# EAGLE board axiom_beta_power_board_v2.23.db4d3e72 (EAGLE 7.7.0), part 1 of 5
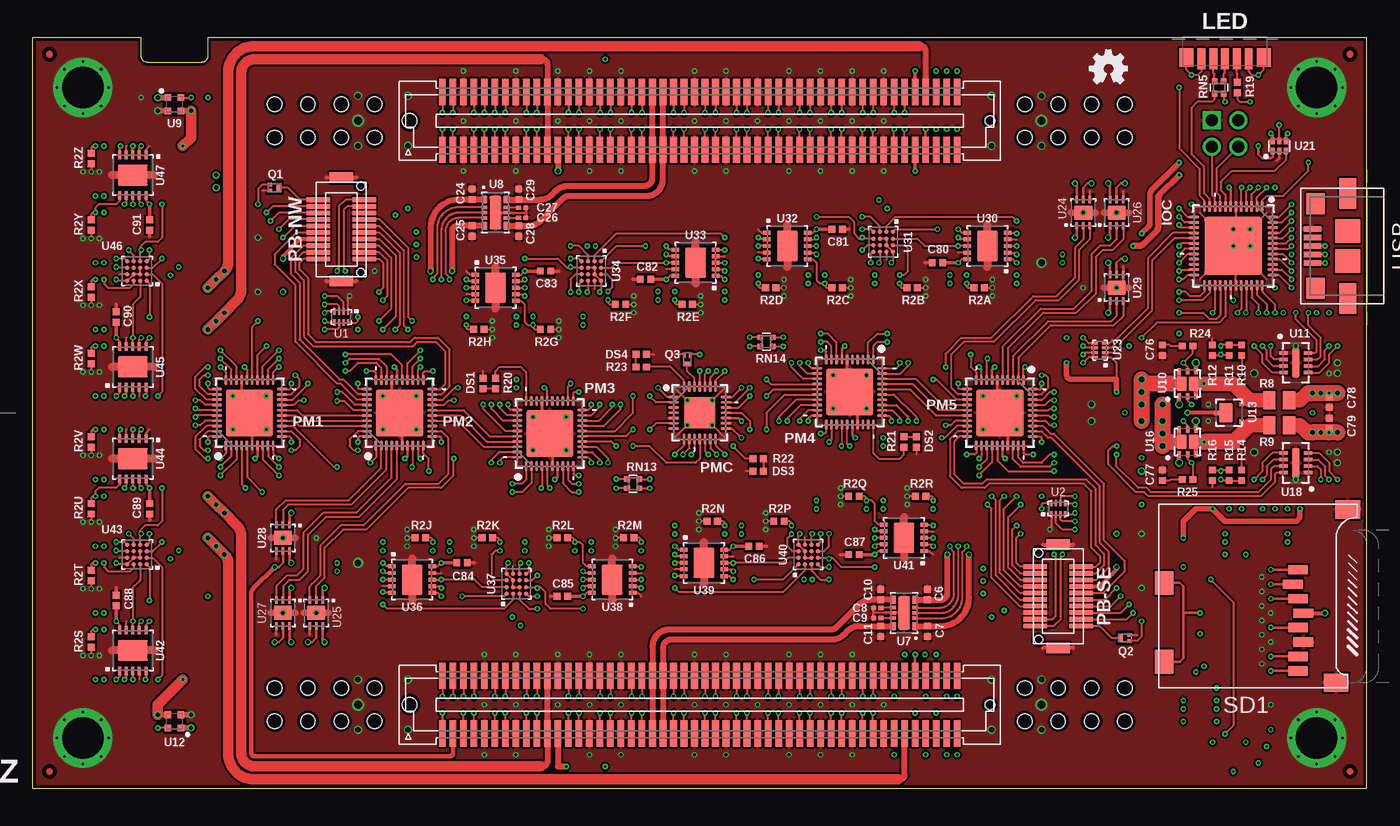
[diagram p0: board, top side]
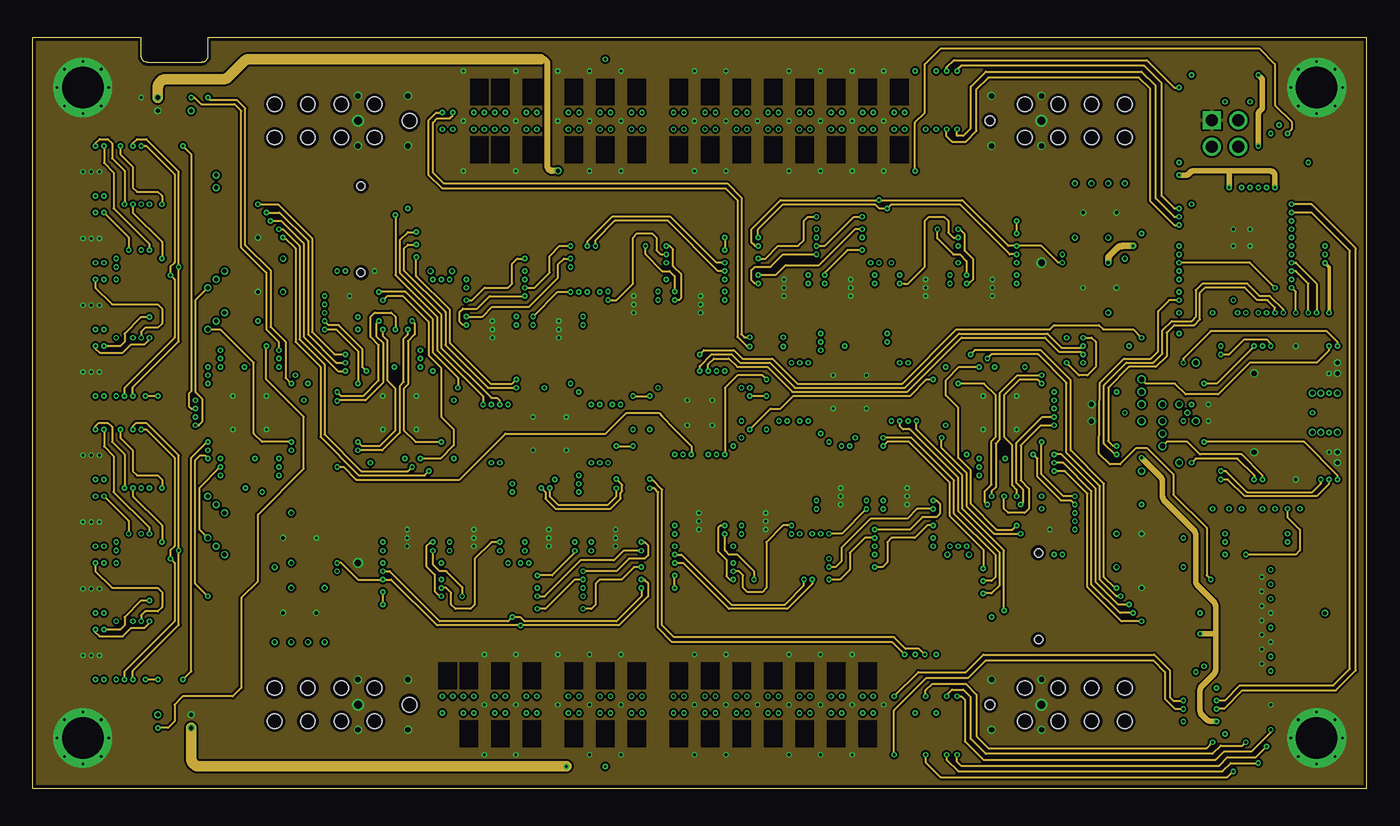
[diagram p1: board, inner layer Route2]
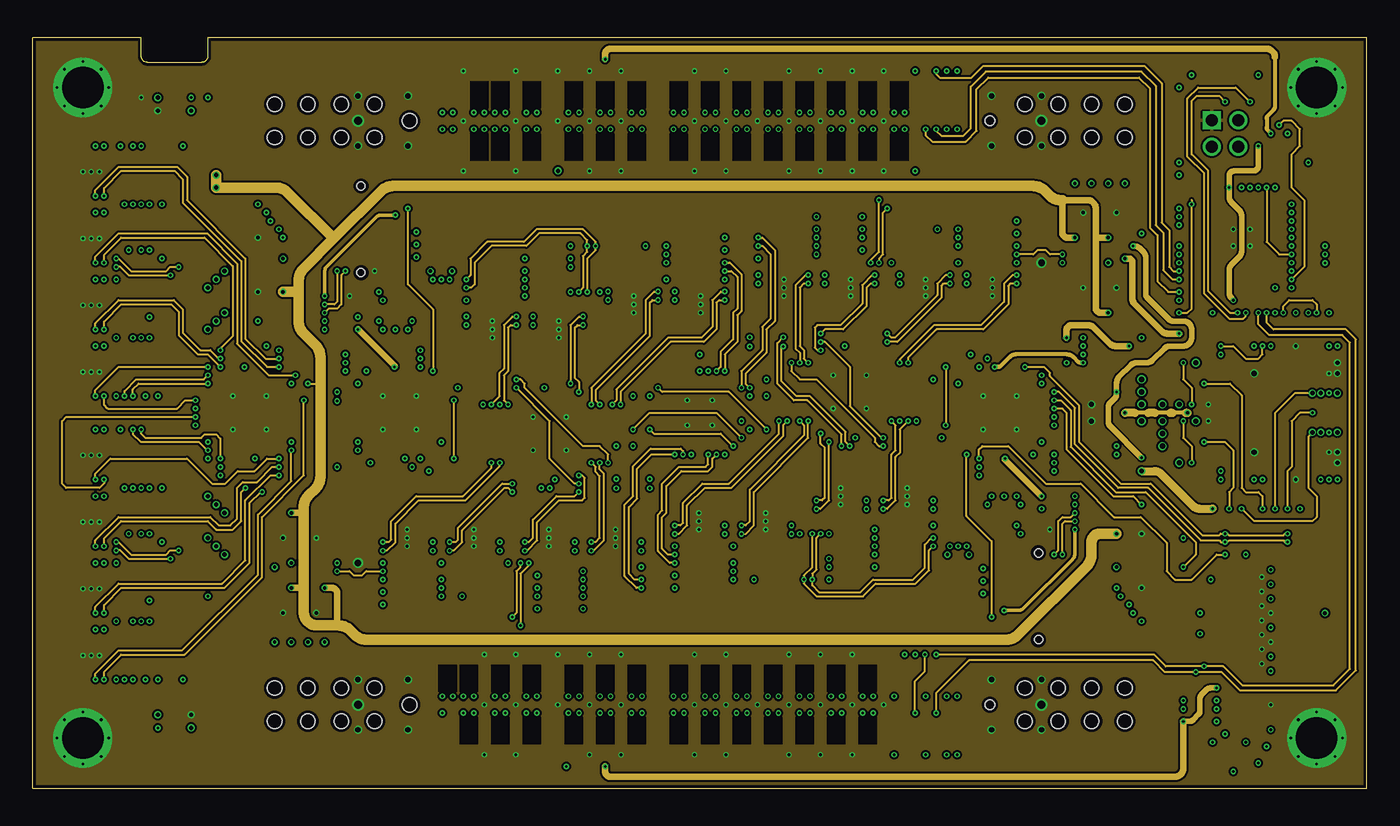
[diagram p2: board, inner layer Route15]
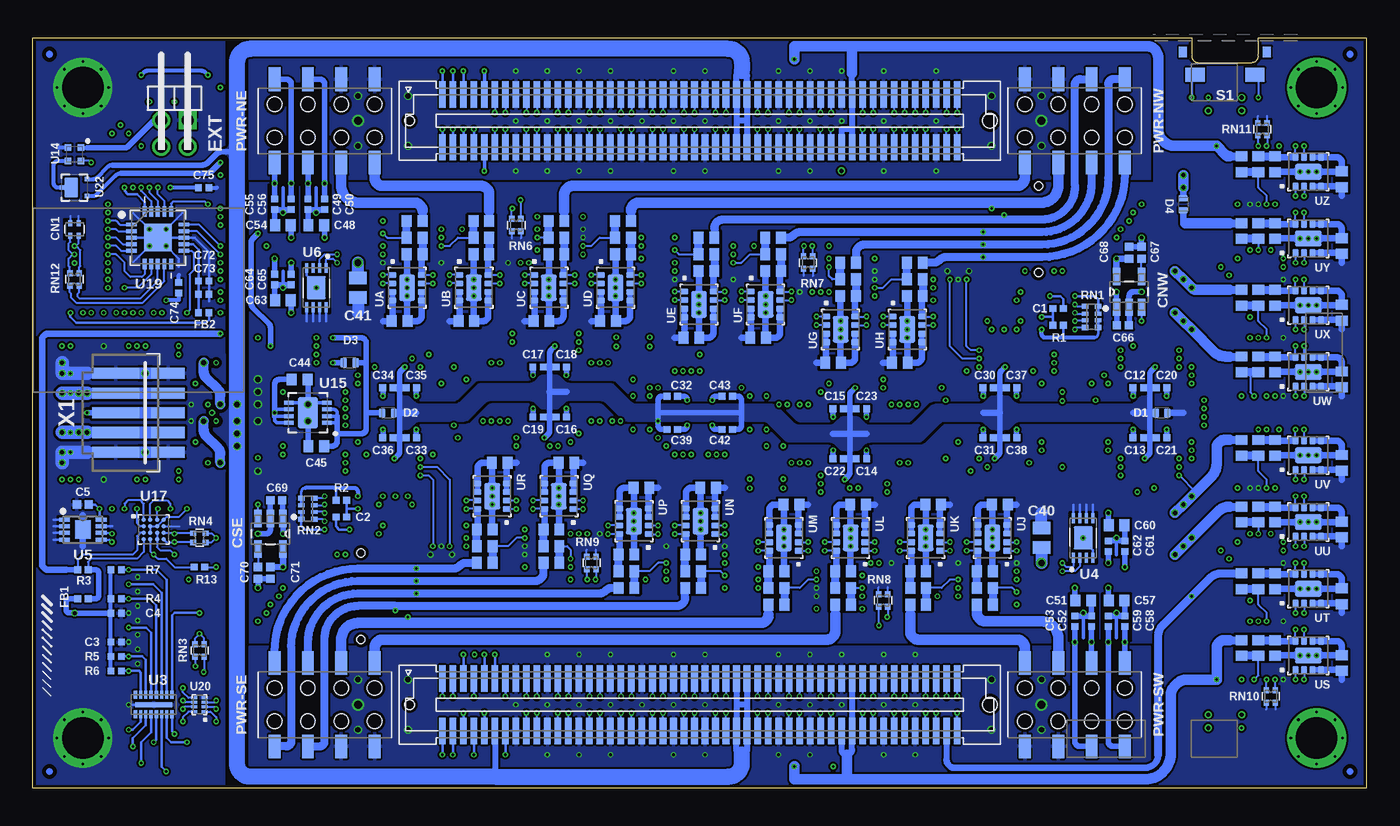
[diagram p3: board, bottom side, seen from below]

Size 101.6 x 57.15 mm. Coordinates in mm from the lower left corner, seen from the top.
Outline: 101.6,57.15 13.33,57.15 13.33,55.75 arc-90 12.83,55.25 8.76,55.25 arc-90 8.25,55.75 8.25,57.15 0,57.15 0,0 101.6,0 101.6,57.15
Copper layers (1*2*15*16): Top 0.035559375mm / dielectric 0.17018125mm / Route2 0.01778125mm / dielectric 47mil / Route15 0.01778125mm / dielectric 0.17018125mm / Bottom 0.035559375mm
Design rules "OSHPark-4layer-tuned *": minimum track width 5mil, minimum drill 8mil, track to track 6mil, track to pad 5mil, pad to pad 5mil, via to via 5mil, smd to smd 0mil, copper to edge 10mil, drill to drill 6mil, minimum pad ring 4mil, minimum via ring 4mil, stop-mask expansion 2mil, vias tented up to drill 25mil, thermal gap 6mil
Net classes: 1 LVDS: width 0.152 mm, drill 0.203 mm, clearance 0.152 mm
tKeepout: area 1.3,50.8 to 6.3,55.9; area 1.3,1.3 to 6.3,6.3; area 95.2,1.3 to 100.3,6.3; area 95.2,50.8 to 100.3,55.9
bKeepout: area 95.2,50.8 to 100.3,55.9; area 95.2,1.3 to 100.3,6.3; area 1.3,1.3 to 6.3,6.3; area 1.3,50.8 to 6.3,55.9

## Footprints (pad centres in the part's own frame; a part is rotated, then mirrored left to right if it is on the bottom)
µZ-SOCKET-NOHOLES-R = smd 0.5 x 2: 1 19.6,24.425; 2 19.6,20.027; 3 18.8,24.425; 4 18.8,20.027; 5 18,24.425; 6 18,20.027; 7 17.2,24.425; 8 17.2,20.027; 9 16.4,24.425; 10 16.4,20.027; 11 15.6,24.425; 12 15.6,20.027; 13 14.8,24.425; 14 14.8,20.027; 15 14,24.425; 16 14,20.027; 17 13.2,24.425; 18 13.2,20.027; 19 12.4,24.425; 20 12.4,20.027; 21 11.6,24.425; 22 11.6,20.027; 23 10.8,24.425; 24 10.8,20.027; 25 10,24.425; 26 10,20.027; 27 9.2,24.425; 28 9.2,20.027; 29 8.4,24.425; 30 8.4,20.027; 31 7.6,24.425; 32 7.6,20.027; 33 6.8,24.425; 34 6.8,20.027; 35 6,24.425; 36 6,20.027; 37 5.2,24.425; 38 5.2,20.027; 39 4.4,24.425; 40 4.4,20.027; 41 3.6,24.425; 42 3.6,20.027; 43 2.8,24.425; 44 2.8,20.027; 45 2,24.425; 46 2,20.027; 47 1.2,24.425; 48 1.2,20.027; 49 0.4,24.425; 50 0.4,20.027; 51 -0.4,24.425; 52 -0.4,20.027; 53 -1.2,24.425; 54 -1.2,20.027; 55 -2,24.425; 56 -2,20.027; 57 -2.8,24.425; 58 -2.8,20.027; 59 -3.6,24.425; 60 -3.6,20.027; 61 -4.4,24.425; 62 -4.4,20.027; 63 -5.2,24.425; 64 -5.2,20.027; 65 -6,24.425; 66 -6,20.027; 67 -6.8,24.425; 68 -6.8,20.027; 69 -7.6,24.425; 70 -7.6,20.027; 71 -8.4,24.425; 72 -8.4,20.027; 73 -9.2,24.425; 74 -9.2,20.027; 75 -10,24.425; 76 -10,20.027; 77 -10.8,24.425; 78 -10.8,20.027; 79 -11.6,24.425; 80 -11.6,20.027; 81 -12.4,24.425; 82 -12.4,20.027; 83 -13.2,24.425; 84 -13.2,20.027; 85 -14,24.425; 86 -14,20.027; 87 -14.8,24.425; 88 -14.8,20.027; 89 -15.6,24.425; 90 -15.6,20.027; 91 -16.4,24.425; 92 -16.4,20.027; 93 -17.2,24.425; 94 -17.2,20.027; 95 -18,24.425; 96 -18,20.027; 97 -18.8,24.425; 98 -18.8,20.027; 99 -19.6,24.425; 100 -19.6,20.027; 101 19.6,-20.025; 102 19.6,-24.425; 103 18.8,-20.027; 104 18.8,-24.425; 105 18,-20.027; 106 18,-24.425; 107 17.2,-20.027; 108 17.2,-24.425; 109 16.4,-20.027; 110 16.4,-24.425; 111 15.6,-20.027; 112 15.6,-24.425; 113 14.8,-20.027; 114 14.8,-24.425; 115 14,-20.027; 116 14,-24.425; 117 13.2,-20.027; 118 13.2,-24.425; 119 12.4,-20.027; 120 12.4,-24.425; 121 11.6,-20.027; 122 11.6,-24.425; 123 10.8,-20.027; 124 10.8,-24.425; 125 10,-20.027; 126 10,-24.425; 127 9.2,-20.027; 128 9.2,-24.425; 129 8.4,-20.027; 130 8.4,-24.425; 131 7.6,-20.027; 132 7.6,-24.425; 133 6.8,-20.027; 134 6.8,-24.425; 135 6,-20.027; 136 6,-24.425; 137 5.2,-20.027; 138 5.2,-24.425; 139 4.4,-20.027; 140 4.4,-24.425; 141 3.6,-20.027; 142 3.6,-24.425; 143 2.8,-20.027; 144 2.8,-24.425; 145 2,-20.027; 146 2,-24.425; 147 1.2,-20.027; 148 1.2,-24.425; 149 0.4,-20.027; 150 0.4,-24.425; 151 -0.4,-20.027; 152 -0.4,-24.425; 153 -1.2,-20.027; 154 -1.2,-24.425; 155 -2,-20.027; 156 -2,-24.425; 157 -2.8,-20.027; 158 -2.8,-24.425; 159 -3.6,-20.027; 160 -3.6,-24.425; 161 -4.4,-20.027; 162 -4.4,-24.425; 163 -5.2,-20.027; 164 -5.2,-24.425; 165 -6,-20.027; 166 -6,-24.425; 167 -6.8,-20.027; 168 -6.8,-24.425; 169 -7.6,-20.027; 170 -7.6,-24.425; 171 -8.4,-20.027; 172 -8.4,-24.425; 173 -9.2,-20.027; 174 -9.2,-24.425; 175 -10,-20.027; 176 -10,-24.425; 177 -10.8,-20.027; 178 -10.8,-24.425; 179 -11.6,-20.027; 180 -11.6,-24.425; 181 -12.4,-20.027; 182 -12.4,-24.425; 183 -13.2,-20.027; 184 -13.2,-24.425; 185 -14,-20.027; 186 -14,-24.425; 187 -14.8,-20.027; 188 -14.8,-24.425; 189 -15.6,-20.027; 190 -15.6,-24.425; 191 -16.4,-20.027; 192 -16.4,-24.425; 193 -17.2,-20.027; 194 -17.2,-24.425; 195 -18,-20.027; 196 -18,-24.425; 197 -18.8,-20.027; 198 -18.8,-24.425; 199 -19.6,-20.027; 200 -19.6,-24.425 | hole 0.725: 22.1,22.225; 22.1,-22.225 | hole 1.125: -22.1,22.225; -22.1,-22.225
0402-C = smd 0.52 x 0.52: 1 -0.4,0; 2 0.4,0
0603-C = smd 0.75 x 0.9: 1 -0.6,0; 2 0.6,0
0402-B = smd 0.62 x 0.62: 1 -0.45,0; 2 0.45,0
0201-C = smd 0.36 x 0.32: 1 -0.28,0; 2 0.28,0
0805-C = smd 0.95 x 1.35: 1 -0.75,0; 2 0.75,0
CC0504 = smd 0.3 x 0.45: 1 -0.32,-0.475; 2 0.32,-0.475; 3 0.32,0.475; 4 -0.32,0.475
SOT95P280X145-5N = smd 1.321 x 0.559: 1 -1.168,0.94; 2 -1.168,0; 3 -1.168,-0.94; 4 1.168,-0.94; 5 1.168,0.94
DFN1006D-2 = smd 0.5 x 0.7: A 0.45,0; C -0.45,0
2X02M/90-S = drill 0.914 square: 1 1,1 | drill 0.914: 2 1,-1; 3 -1,1; 4 -1,-1
UQFN50P600X600X100-49N-NSM = smd 0.8 x 0.2: 1 -3,2.2; 2 -3,1.8; 3 -3,1.4; 4 -3,1; 5 -3,0.6; 6 -3,0.2; 7 -3,-0.2; 8 -3,-0.6; 9 -3,-1; 10 -3,-1.4; 11 -3,-1.8; 12 -3,-2.2; 25 3,-2.2; 26 3,-1.8; 27 3,-1.4; 28 3,-1; 29 3,-0.6; 30 3,-0.2; 31 3,0.2; 32 3,0.6; 33 3,1; 34 3,1.4; 35 3,1.8; 36 3,2.2 | smd 0.2 x 0.8: 13 -2.2,-3; 14 -1.8,-3; 15 -1.4,-3; 16 -1,-3; 17 -0.6,-3; 18 -0.2,-3; 19 0.2,-3; 20 0.6,-3; 21 1,-3; 22 1.4,-3; 23 1.8,-3; 24 2.2,-3; 37 2.2,3; 38 1.8,3; 39 1.4,3; 40 1,3; 41 0.6,3; 42 0.2,3; 43 -0.2,3; 44 -0.6,3; 45 -1,3; 46 -1.4,3; 47 -1.8,3; 48 -2.2,3 | smd 4.4 x 4.4: EP 0,0
MSL0104-SL = smd 1.06 x 1.4: 1 2.95,-0.9; 7 -2.95,-0.9 | smd 0.6 x 1.6: 2 1.8,-1; 3 0.9,-1; 4 0,-1; 5 -0.9,-1; 6 -1.8,-1
DF12(XX)-20DP-0.5V = smd 1.8 x 0.35: 1 -1.75,2.25; 2 1.75,2.25; 3 -1.75,1.75; 4 1.75,1.75; 5 -1.75,1.25; 6 1.75,1.25; 7 -1.75,0.75; 8 1.75,0.75; 9 -1.75,0.25; 10 1.75,0.25; 11 -1.75,-0.25; 12 1.75,-0.25; 13 -1.75,-0.75; 14 1.75,-0.75; 15 -1.75,-1.25; 16 1.75,-1.25; 17 -1.75,-1.75; 18 1.75,-1.75; 19 -1.75,-2.25; 20 1.75,-2.25 | smd 1.8 x 0.8: M1 0,3.95; M2 0,-3.95 | hole 0.625: 1.5,-3.3; 1.5,3.3
UQFN40P500X500X100-41N-NSM = smd 0.75 x 0.2: 1 -2.48,1.8; 2 -2.48,1.4; 3 -2.48,1; 4 -2.48,0.6; 5 -2.48,0.2; 6 -2.48,-0.2; 7 -2.48,-0.6; 8 -2.48,-1; 9 -2.48,-1.4; 10 -2.48,-1.8; 21 2.48,-1.8; 22 2.48,-1.4; 23 2.48,-1; 24 2.48,-0.6; 25 2.48,-0.2; 26 2.48,0.2; 27 2.48,0.6; 28 2.48,1; 29 2.48,1.4; 30 2.48,1.8 | smd 0.2 x 0.75: 11 -1.8,-2.48; 12 -1.4,-2.48; 13 -1,-2.48; 14 -0.6,-2.48; 15 -0.2,-2.48; 16 0.2,-2.48; 17 0.6,-2.48; 18 1,-2.48; 19 1.4,-2.48; 20 1.8,-2.48; 31 1.8,2.48; 32 1.4,2.48; 33 1,2.48; 34 0.6,2.48; 35 0.2,2.48; 36 -0.2,2.48; 37 -0.6,2.48; 38 -1,2.48; 39 -1.4,2.48; 40 -1.8,2.48 | smd 3.6 x 3.6: EP 0,0
UQFN50P400X400X100-29N-NSM = smd 0.8 x 0.2: 1 -2,1.2; 2 -2,0.8; 3 -2,0.4; 4 -2,0; 5 -2,-0.4; 6 -2,-0.8; 7 -2,-1.2; 15 2,-1.2; 16 2,-0.8; 17 2,-0.4; 18 2,0; 19 2,0.4; 20 2,0.8; 21 2,1.2 | smd 0.2 x 0.8: 8 -1.2,-2; 9 -0.8,-2; 10 -0.4,-2; 11 0,-2; 12 0.4,-2; 13 0.8,-2; 14 1.2,-2; 22 1.2,2; 23 0.8,2; 24 0.4,2; 25 0,2; 26 -0.4,2; 27 -0.8,2; 28 -1.2,2 | smd 2.4 x 2.4: EP 0,0
R2X04 = smd 0.9 x 1.8: 1 -3.81,3.175; 2 -3.81,-3.175; 3 -1.27,3.175; 4 -1.27,-3.175; 5 1.27,3.175; 6 1.27,-3.175; 7 3.81,3.175; 8 3.81,-3.175 | hole 1.1: -3.81,1.27; -1.27,1.27; -1.27,-1.27; -3.81,-1.27; 1.27,1.27; 1.27,-1.27; 3.81,1.27; 3.81,-1.27
SOT883(B) = smd 0.4 x 0.25: 1 -0.35,0.225; 2 -0.35,-0.225 | smd 0.4 x 0.7: 3 0.35,0
4X0402ARV341 = smd 0.4 x 0.5: 1 -0.8,-0.5; 4 0.8,-0.5; 5 0.8,0.5; 8 -0.8,0.5 | smd 0.3 x 0.5: 2 -0.25,-0.5; 3 0.25,-0.5; 6 0.25,0.5; 7 -0.25,0.5
EXB24V = smd 0.4 x 0.45: 1 -0.35,-0.475; 2 0.35,-0.475; 3 0.35,0.475; 4 -0.35,0.475
SKSNLAE010 = smd 1.45 x 1.05: 1 -2.275,2.575; 2 2.275,2.575 | smd 0.6 x 0.8: 3 -3.2,0.85; 4 3.2,0.85
TF-MICRO-SD_PP2 = smd 0.7 x 1.5: 1 9,-10.64; 2 7.9,-10.24; 3 6.8,-10.64; 4 5.7,-11.04; 5 4.6,-10.64; 6 3.5,-11.04; 7 2.4,-10.64; 8 1.3,-10.64 | smd 1.8 x 1.4: CD1 2,-0.44; CD2 8,-0.44 | smd 1.4 x 1.9: MT1 0.4,-13.54; MT2 13.6,-14.44
UDFN-8 = smd 0.22 x 0.48: 1 -0.525,-0.43; 2 -0.175,-0.43; 3 0.175,-0.43; 4 0.525,-0.43; 5 0.525,0.43; 6 0.175,0.43; 7 -0.175,0.43; 8 -0.525,0.43
SON40P135X330X55-17N = smd 0.61 x 0.254: 1 -0.737,1.397; 2 -0.737,0.991; 3 -0.737,0.61; 4 -0.737,0.203; 5 -0.737,-0.203; 6 -0.737,-0.61; 7 -0.737,-0.991; 8 -0.737,-1.397; 9 0.737,-1.397; 10 0.737,-0.991; 11 0.737,-0.61; 12 0.737,-0.203; 13 0.737,0.203; 14 0.737,0.61; 15 0.737,0.991; 16 0.737,1.397 | smd 0.406 x 2.794: 17 0,0
DFN-8 = smd 0.3 x 0.75: 1 -0.75,-1.5; 2 -0.25,-1.5; 3 0.25,-1.5; 4 0.75,-1.5; 5 0.75,1.5; 6 0.25,1.5; 7 -0.25,1.5; 8 -0.75,1.5 | smd 1.45 x 1.75: EP 0,0
DFN200X300X100-9N = smd 0.813 x 0.305: 1 -1.397,0.762; 2 -1.397,0.254; 3 -1.397,-0.254; 4 -1.397,-0.762; 5 1.397,-0.762; 6 1.397,-0.254; 7 1.397,0.254; 8 1.397,0.762 | smd 1.194 x 1.397: EP 0,0
V-DFN3020-14 = smd 0.65 x 0.5: 1 -1,-0.85; 5 1,-0.85; 6 1,0.85; 10 -1,0.85 | smd 0.25 x 0.5: 2 -0.4,-0.85; 3 0,-0.85; 4 0.4,-0.85; 7 0.4,0.85; 8 0,0.85; 9 -0.4,0.85 | smd 2.55 x 0.9: EP 0,0
MLF-4 = smd 0.5 x 0.5: 1 -0.5,-0.5; 2 0.5,-0.5; 3 0.5,0.5; 4 -0.5,0.5
UDFN6 = smd 0.47 x 0.35: 1 -0.95,0.65; 2 -0.95,0; 3 -0.95,-0.65; 4 0.95,-0.65; 5 0.95,0; 6 0.95,0.65 | smd 1.1 x 0.75: D1 0,0.46; D2 0,-0.46
DFN8 = smd 0.25 x 0.7: 1 -0.75,-0.925; 2 -0.25,-0.925; 3 0.25,-0.925; 4 0.75,-0.925; 5 0.75,0.925; 6 0.25,0.925; 7 -0.25,0.925; 8 -0.75,0.925 | smd 2.2 x 0.6: EP 0,0
DFN2020D-3 = smd 0.45 x 0.35: 1 -0.95,0.65; 2 -0.95,-0.65; 3 0.95,0 | smd 1 x 1.5: 4 0.25,0
DFN3X3_8LEAD = smd 0.813 x 0.305: 1 -1.448,0.762; 2 -1.448,0.254; 3 -1.448,-0.254; 4 -1.448,-0.762; 5 1.448,-0.762; 6 1.448,-0.254; 7 1.448,0.254; 8 1.448,0.762 | smd 1.549 x 2.388: 9 0,0
WLCSP-16-LP = smd 0.325 x 0.325: A1 -0.75,0.75; A2 -0.25,0.75; A3 0.25,0.75; A4 0.75,0.75; B1 -0.75,0.25; B2 -0.25,0.25; B3 0.25,0.25; B4 0.75,0.25; C1 -0.75,-0.25; C2 -0.25,-0.25; C3 0.25,-0.25; C4 0.75,-0.25; D1 -0.75,-0.75; D2 -0.25,-0.75; D3 0.25,-0.75; D4 0.75,-0.75
QFN65P400X400X100-21N-NSM = smd 0.8 x 0.3: 1 -2,1; 2 -2,0.5; 3 -2,0; 4 -2,-0.5; 5 -2,-1; 11 2,-1; 12 2,-0.5; 13 2,0; 14 2,0.5; 15 2,1 | smd 0.3 x 0.8: 6 -1,-2; 7 -0.5,-2; 8 0,-2; 9 0.5,-2; 10 1,-2; 16 1,2; 17 0.5,2; 18 0,2; 19 -0.5,2; 20 -1,2 | smd 2.1 x 2.1: EP 0,0
X2SON-8 = smd 0.2 x 0.52: 1 -0.525,-0.4; 2 -0.175,-0.4; 3 0.175,-0.4; 4 0.525,-0.4; 5 0.525,0.4; 6 0.175,0.4; 7 -0.175,0.4; 8 -0.525,0.4
MICROPAK-6 = smd 0.3 x 0.5: 1 -0.5,-0.375; 2 0,-0.375; 3 0.5,-0.375; 4 0.5,0.375; 5 0,0.375; 6 -0.5,0.375
DFN2018-6 = smd 0.25 x 0.55: 1 -0.5,-1; 2 0,-1; 3 0.5,-1; 4 0.5,1; 5 0,1; 6 -0.5,1 | smd 1.4 x 1.1: 10 0,0
DFN-10 = smd 0.3 x 0.65: 1 -1,-1.55; 2 -0.5,-1.55; 3 0,-1.55; 4 0.5,-1.55; 5 1,-1.55; 6 1,1.55; 7 0.5,1.55; 8 0,1.55; 9 -0.5,1.55; 10 -1,1.55 | smd 2.3 x 1.6: EP 0,0
MICROSIP = smd 0.48 x 0.58: 1 -0.975,-1.1; 2 -0.325,-1.1; 3 0.325,-1.1; 4 0.975,-1.1; 5 0.975,1.1; 6 0.325,1.1; 7 -0.325,1.1; 8 -0.975,1.1 | smd 2 x 1.2: EP 0,0
MICRO-AB-H-SMT = smd 0.4 x 1.35: 1 -1.3,4.125; 2 -0.65,4.125; 3 0,4.125; 4 0.65,4.125; 5 1.3,4.125 | smd 2.3 x 1.3: Z1 -4,1.45; Z4 4,1.45 | smd 1.8 x 1.9: Z2 -1.15,1.45; Z3 1.15,1.45 | smd 1.6 x 1.4: Z5 -3.2,3.9; Z6 3.2,3.9
PICO-SPOX-5 = smd 0.85 x 2.55: 1 -3,-6.5; 2 -1.5,-6.5; 3 0,-6.5; 4 1.5,-6.5; 5 3,-6.5 | smd 0.85 x 3.55: 1A -3,-2.5; 2A -1.5,-2.5; 3A 0,-2.5; 4A 1.5,-2.5; 5A 3,-2.5
µZ-CONONLY = smd 0.5 x 2: 1 19.6,-24.226; 2 19.6,-20.226; 3 18.8,-24.226; 4 18.8,-20.226; 5 18,-24.226; 6 18,-20.226; 7 17.2,-24.226; 8 17.2,-20.226; 9 16.4,-24.226; 10 16.4,-20.226; 11 15.6,-24.226; 12 15.6,-20.226; 13 14.8,-24.226; 14 14.8,-20.226; 15 14,-24.226; 16 14,-20.226; 17 13.2,-24.226; 18 13.2,-20.226; 19 12.4,-24.226; 20 12.4,-20.226; 21 11.6,-24.226; 22 11.6,-20.226; 23 10.8,-24.226; 24 10.8,-20.226; 25 10,-24.226; 26 10,-20.226; 27 9.2,-24.226; 28 9.2,-20.226; 29 8.4,-24.226; 30 8.4,-20.226; 31 7.6,-24.226; 32 7.6,-20.226; 33 6.8,-24.226; 34 6.8,-20.226; 35 6,-24.226; 36 6,-20.226; 37 5.2,-24.226; 38 5.2,-20.226; 39 4.4,-24.226; 40 4.4,-20.226; 41 3.6,-24.226; 42 3.6,-20.226; 43 2.8,-24.226; 44 2.8,-20.226; 45 2,-24.226; 46 2,-20.226; 47 1.2,-24.226; 48 1.2,-20.226; 49 0.4,-24.226; 50 0.4,-20.226; 51 -0.4,-24.226; 52 -0.4,-20.226; 53 -1.2,-24.226; 54 -1.2,-20.226; 55 -2,-24.226; 56 -2,-20.226; 57 -2.8,-24.226; 58 -2.8,-20.226; 59 -3.6,-24.226; 60 -3.6,-20.226; 61 -4.4,-24.226; 62 -4.4,-20.226; 63 -5.2,-24.226; 64 -5.2,-20.226; 65 -6,-24.226; 66 -6,-20.226; 67 -6.8,-24.226; 68 -6.8,-20.226; 69 -7.6,-24.226; 70 -7.6,-20.226; 71 -8.4,-24.226; 72 -8.4,-20.226; 73 -9.2,-24.226; 74 -9.2,-20.226; 75 -10,-24.226; 76 -10,-20.226; 77 -10.8,-24.226; 78 -10.8,-20.226; 79 -11.6,-24.226; 80 -11.6,-20.226; 81 -12.4,-24.226; 82 -12.4,-20.226; 83 -13.2,-24.226; 84 -13.2,-20.226; 85 -14,-24.226; 86 -14,-20.226; 87 -14.8,-24.226; 88 -14.8,-20.226; 89 -15.6,-24.226; 90 -15.6,-20.226; 91 -16.4,-24.226; 92 -16.4,-20.226; 93 -17.2,-24.226; 94 -17.2,-20.226; 95 -18,-24.226; 96 -18,-20.226; 97 -18.8,-24.226; 98 -18.8,-20.226; 99 -19.6,-24.226; 100 -19.6,-20.226; 101 19.6,20.226; 102 19.6,24.226; 103 18.8,20.226; 104 18.8,24.226; 105 18,20.226; 106 18,24.226; 107 17.2,20.226; 108 17.2,24.226; 109 16.4,20.226; 110 16.4,24.226; 111 15.6,20.226; 112 15.6,24.226; 113 14.8,20.226; 114 14.8,24.226; 115 14,20.226; 116 14,24.226; 117 13.2,20.226; 118 13.2,24.226; 119 12.4,20.226; 120 12.4,24.226; 121 11.6,20.226; 122 11.6,24.226; 123 10.8,20.226; 124 10.8,24.226; 125 10,20.226; 126 10,24.226; 127 9.2,20.226; 128 9.2,24.226; 129 8.4,20.226; 130 8.4,24.226; 131 7.6,20.226; 132 7.6,24.226; 133 6.8,20.226; 134 6.8,24.226; 135 6,20.226; 136 6,24.226; 137 5.2,20.226; 138 5.2,24.226; 139 4.4,20.226; 140 4.4,24.226; 141 3.6,20.226; 142 3.6,24.226; 143 2.8,20.226; 144 2.8,24.226; 145 2,20.226; 146 2,24.226; 147 1.2,20.226; 148 1.2,24.226; 149 0.4,20.226; 150 0.4,24.226; 151 -0.4,20.226; 152 -0.4,24.226; 153 -1.2,20.226; 154 -1.2,24.226; 155 -2,20.226; 156 -2,24.226; 157 -2.8,20.226; 158 -2.8,24.226; 159 -3.6,20.226; 160 -3.6,24.226; 161 -4.4,20.226; 162 -4.4,24.226; 163 -5.2,20.226; 164 -5.2,24.226; 165 -6,20.226; 166 -6,24.226; 167 -6.8,20.226; 168 -6.8,24.226; 169 -7.6,20.226; 170 -7.6,24.226; 171 -8.4,20.226; 172 -8.4,24.226; 173 -9.2,20.226; 174 -9.2,24.226; 175 -10,20.226; 176 -10,24.226; 177 -10.8,20.226; 178 -10.8,24.226; 179 -11.6,20.226; 180 -11.6,24.226; 181 -12.4,20.226; 182 -12.4,24.226; 183 -13.2,20.226; 184 -13.2,24.226; 185 -14,20.226; 186 -14,24.226; 187 -14.8,20.226; 188 -14.8,24.226; 189 -15.6,20.226; 190 -15.6,24.226; 191 -16.4,20.226; 192 -16.4,24.226; 193 -17.2,20.226; 194 -17.2,24.226; 195 -18,20.226; 196 -18,24.226; 197 -18.8,20.226; 198 -18.8,24.226; 199 -19.6,20.226; 200 -19.6,24.226 | hole 1.125: -22.1,-22.225; -22.1,22.225 | hole 0.725: 22.1,-22.225; 22.1,22.225

## Placement (x,y rotation side)
BETA  µZ-FCI-SOCKET-NOHOLES-R  [µZ-SOCKET-NOHOLES-R]  50.8,28.57 0 top
C1  10n  [0402-C]  23.49,36.51 0 bottom
C1A  [0603-C]  73.66,35.56 0 bottom
C1B  [0603-C]  68.58,35.56 0 bottom
C1C  [0603-C]  62.86,35.56 0 bottom
C1D  [0603-C]  57.78,35.56 0 bottom
C1E  [0603-C]  51.43,34.29 0 bottom
C1F  [0603-C]  46.35,34.29 0 bottom
C1G  [0603-C]  40.64,32.38 0 bottom
C1H  [0603-C]  35.56,32.38 0 bottom
C1J  [0603-C]  27.94,21.59 180 bottom
C1K  [0603-C]  33.02,21.59 180 bottom
C1L  [0603-C]  38.73,21.59 180 bottom
C1M  [0603-C]  43.81,21.59 180 bottom
C1N  [0603-C]  50.16,22.86 180 bottom
C1P  [0603-C]  55.24,22.86 180 bottom
C1Q  [0603-C]  60.96,24.77 180 bottom
C1R  [0603-C]  66.04,24.77 180 bottom
C1S  [0603-C]  1.9,9.52 90 bottom
C1T  [0603-C]  1.9,14.6 90 bottom
C1U  [0603-C]  1.9,19.68 90 bottom
C1V  [0603-C]  1.9,24.77 90 bottom
C1W  [0603-C]  1.9,31.11 90 bottom
C1X  [0603-C]  1.9,36.2 90 bottom
C1Y  [0603-C]  1.9,41.27 90 bottom
C1Z  [0603-C]  1.9,46.36 90 bottom
C2  10n  [0402-C]  78.1,20.64 180 bottom
C2A  [0603-C]  72.52,40.64 180 bottom
C2B  [0603-C]  67.44,40.64 180 bottom
C2C  [0603-C]  61.72,40.64 180 bottom
C2D  [0603-C]  56.64,40.64 180 bottom
C2E  [0603-C]  50.29,39.37 180 bottom
C2F  [0603-C]  45.21,39.37 180 bottom
C2G  [0603-C]  39.5,37.47 180 bottom
C2H  [0603-C]  34.42,37.47 180 bottom
C2J  [0603-C]  29.08,16.51 0 bottom
C2K  [0603-C]  34.16,16.51 0 bottom
C2L  [0603-C]  39.88,16.51 0 bottom
C2M  [0603-C]  44.96,16.51 0 bottom
C2N  [0603-C]  51.31,17.78 0 bottom
C2P  [0603-C]  56.39,17.78 0 bottom
C2Q  [0603-C]  62.1,19.68 0 bottom
C2R  [0603-C]  67.18,19.68 0 bottom
C2S  [0603-C]  6.98,10.67 270 bottom
C2T  [0603-C]  6.98,15.75 270 bottom
C2U  [0603-C]  6.98,20.83 270 bottom
C2V  [0603-C]  6.98,25.91 270 bottom
C2W  [0603-C]  6.98,32.26 270 bottom
C2X  [0603-C]  6.98,37.34 270 bottom
C2Y  [0603-C]  6.98,42.42 270 bottom
C2Z  [0603-C]  6.98,47.5 270 bottom
C3  1u  [0402-C]  95.25,11.12 0 bottom
C4  100n  [0402-C]  95.25,13.32 0 bottom
C5  100n  [0402-B]  97.79,21.59 180 bottom
C6  [0402-C]  68.14,14.73 90 top
C7  [0402-C]  68.14,11.94 270 top
C8  [0201-C]  64.33,13.72 180 top
C9  [0201-C]  64.33,12.95 180 top
C10  [0402-C]  64.58,14.73 90 top
C11  [0402-C]  64.58,11.94 270 top
C12  100n  [0402-C]  17.4,30.48 180 bottom
C13  100n  [0402-C]  17.4,26.67 180 bottom
C14  100n  [0402-C]  38.48,25.08 0 bottom
C15  100n  [0402-C]  40.26,28.89 180 bottom
C16  100n  [0402-C]  61.34,28.26 0 bottom
C17  100n  [0402-C]  63.12,32.07 180 bottom
C18  4u7  [0402-C]  61.34,32.07 0 bottom
C19  4u7  [0402-C]  63.12,28.26 180 bottom
C20  4u7  [0402-C]  15.62,30.48 0 bottom
C21  4u7  [0402-C]  15.62,26.67 0 bottom
C22  4u7  [0402-C]  40.26,25.08 180 bottom
C23  4u7  [0402-C]  38.48,28.89 0 bottom
C24  [0402-C]  33.46,45.21 90 top
C25  [0402-C]  33.46,42.42 270 top
C26  [0201-C]  37.27,43.43 0 top
C27  [0201-C]  37.27,44.2 0 top
C28  [0402-C]  37.02,42.42 270 top
C29  [0402-C]  37.02,45.21 90 top
C30  100n  [0402-C]  28.83,30.48 180 bottom
C31  100n  [0402-C]  28.83,26.67 180 bottom
C32  100n  [0402-C]  52.9,29.84 0 bottom
C33  100n  [0402-C]  72.77,26.67 0 bottom
C34  100n  [0402-C]  74.55,30.48 180 bottom
C35  4u7  [0402-C]  72.77,30.48 0 bottom
C36  4u7  [0402-C]  74.55,26.67 180 bottom
C37  4u7  [0402-C]  27.05,30.48 0 bottom
C38  4u7  [0402-C]  27.05,26.67 0 bottom
C39  4u7  [0402-C]  52.9,27.3 0 bottom
C40  47u  [0805-C]  24.76,19.05 270 bottom
C41  47u  [0805-C]  76.83,38.1 90 bottom
C42  10u  [0402-C]  48.7,27.3 180 bottom
C43  10u  [0402-C]  48.7,29.84 180 bottom
C44  10u  [0603-C]  81.28,31.11 0 bottom
C45  10u  [0603-C]  80.01,26.04 180 bottom
C48  4u7  [0603-C]  80.01,42.86 180 bottom
C49  1u  [0402-C]  80.64,44.45 270 bottom
C50  1u  [0402-C]  79.38,44.45 270 bottom
C51  4u7  [0603-C]  21.59,14.29 0 bottom
C52  1u  [0402-C]  20.95,12.7 90 bottom
C53  1u  [0402-C]  22.22,12.7 90 bottom
C54  4u7  [0603-C]  82.55,42.86 180 bottom
C55  1u  [0402-C]  83.19,44.45 270 bottom
C56  1u  [0402-C]  81.91,44.45 270 bottom
C57  4u7  [0603-C]  19.05,14.29 0 bottom
C58  1u  [0402-C]  18.41,12.7 90 bottom
C59  1u  [0402-C]  19.68,12.7 90 bottom
C60  4u7  [0603-C]  19.05,20 0 bottom
C61  1u  [0402-C]  18.41,18.41 90 bottom
C62  1u  [0402-C]  19.68,18.41 90 bottom
C63  4u7  [0603-C]  82.55,37.15 180 bottom
C64  1u  [0402-C]  83.19,38.73 270 bottom
C65  1u  [0402-C]  81.91,38.73 270 bottom
C66  1u  [0402-B]  18.57,35.24 0 bottom
C67  10n  [0402-B]  17.14,40.77 90 bottom
C68  1u  [0402-B]  18.1,40.77 90 bottom
C69  1u  [0402-B]  83.06,21.91 180 bottom
C70  10n  [0402-B]  84.45,16.38 270 bottom
C71  1u  [0402-B]  83.5,16.38 270 bottom
C72  4u7  [0402-C]  88.58,38.61 0 bottom
C73  100n  [0402-C]  88.58,37.59 0 bottom
C74  4u7  [0402-C]  90.49,38.1 90 bottom
C75  100n  [0402-C]  88.58,45.72 0 bottom
C76  10n  [0402-C]  86.04,33.34 270 top
C77  10n  [0402-C]  86.04,23.81 90 top
C78  10n  [0402-C]  98.74,29.4 270 top
C79  10n  [0402-C]  98.74,27.75 90 top
C80  [0402-C]  68.9,40 180 top
C81  [0402-C]  61.28,42.55 0 top
C82  [0402-C]  46.67,38.73 180 top
C83  [0402-C]  39.05,39.37 0 top
C84  [0402-C]  32.7,17.14 0 top
C85  [0402-C]  40.32,14.6 180 top
C86  [0402-C]  54.93,18.41 0 top
C87  [0402-C]  62.55,17.78 180 top
C88  [0402-C]  6.35,14.29 90 top
C89  [0402-C]  8.89,21.27 270 top
C90  [0402-C]  6.35,35.88 90 top
C91  [0402-C]  8.89,42.86 270 top
CN1  [CC0504]  98.42,42.55 180 bottom
CNW  SPX3819M5-L  [SOT95P280X145-5N]  18.1,37.78 90 bottom
CSE  SPX3819M5-L  [SOT95P280X145-5N]  83.5,19.37 270 bottom
D1  PMEG2010BELD  [DFN1006D-2]  15.62,28.57 0 bottom
D2  PMEG2010BELD  [DFN1006D-2]  74.55,28.57 180 bottom
D3  PMEG2010BELD  [DFN1006D-2]  77.47,32.38 0 bottom
D4  PMEG2010BELD  [DFN1006D-2]  13.97,44.45 270 bottom
DS1  [0402-C]  34.29,30.8 90 top
DS2  [0402-C]  67.31,26.35 270 top
DS3  [0402-C]  55.24,24.13 180 top
DS4  [0402-C]  46.35,33.02 0 top
EXT  [2X02M/90-S]  90.81,49.85 0 bottom
F1  FIDUCIAL  [FID_ARROW]  1.27,55.88 0 top
F2  FIDUCIAL  [FID_ARROW]  100.33,55.88 0 bottom
F3  FIDUCIAL  [FID_ARROW]  100.33,55.88 0 top
F4  FIDUCIAL  [FID_ARROW]  1.27,55.88 0 bottom
F5  FIDUCIAL  [FID_ARROW]  100.33,1.27 0 top
F6  FIDUCIAL  [FID_ARROW]  1.27,1.27 0 bottom
F7  FIDUCIAL  [FID_ARROW]  1.27,1.27 0 top
F8  FIDUCIAL  [FID_ARROW]  100.33,1.27 0 bottom
FB1  [0402-C]  97.79,14.42 180 bottom
FB2  [0402-C]  88.58,36.2 0 bottom
FBA  [0603-C]  72.52,43.18 0 bottom
FBB  [0603-C]  67.44,43.18 0 bottom
FBC  [0603-C]  61.72,43.18 0 bottom
FBD  [0603-C]  56.64,43.18 0 bottom
FBE  [0603-C]  50.29,41.91 0 bottom
FBF  [0603-C]  45.21,41.91 0 bottom
FBG  [0603-C]  39.5,40 0 bottom
FBH  [0603-C]  34.42,40 0 bottom
FBJ  [0603-C]  29.08,13.97 180 bottom
FBK  [0603-C]  34.16,13.97 180 bottom
FBL  [0603-C]  39.88,13.97 180 bottom
FBM  [0603-C]  44.96,13.97 180 bottom
FBN  [0603-C]  51.31,15.24 180 bottom
FBP  [0603-C]  56.39,15.24 180 bottom
FBQ  [0603-C]  62.1,17.14 180 bottom
FBR  [0603-C]  67.18,17.14 180 bottom
FBS  [0603-C]  9.52,10.67 90 bottom
FBT  [0603-C]  9.52,15.75 90 bottom
FBU  [0603-C]  9.52,20.83 90 bottom
FBV  [0603-C]  9.52,25.91 90 bottom
FBW  [0603-C]  9.52,32.26 90 bottom
FBX  [0603-C]  9.52,37.34 90 bottom
FBY  [0603-C]  9.52,42.42 90 bottom
FBZ  [0603-C]  9.52,47.5 90 bottom
IOC  PIC16F15386  [UQFN50P600X600X100-49N-NSM]  91.44,41.27 270 top
LED  MSL0104RGB  [MSL0104-SL]  90.81,56.52 0 top
LOGO1  OSHW_LOGO_FILLX0100-NT  [OSHW_FILLX100_NOTEXT]  80.52,53.66 0 top
PB-NW  DF12(XX)-20DP-0.5V  [DF12(XX)-20DP-0.5V]  23.49,42.55 0 top
PB-SE  DF12(XX)-20DP-0.5V  [DF12(XX)-20DP-0.5V]  78.1,14.6 180 top
PM1  PIC16F1779-NSM  [UQFN40P500X500X100-41N-NSM]  16.51,28.57 90 top
PM2  PIC16F1779-NSM  [UQFN40P500X500X100-41N-NSM]  27.94,28.57 90 top
PM3  PIC16F1779-NSM  [UQFN40P500X500X100-41N-NSM]  39.37,26.99 90 top
PM4  PIC16F1779-NSM  [UQFN40P500X500X100-41N-NSM]  62.23,30.16 270 top
PM5  PIC16F1779-NSM  [UQFN40P500X500X100-41N-NSM]  73.66,28.57 270 top
PMC  PIC16F15356  [UQFN50P400X400X100-29N-NSM]  50.8,28.57 0 top
PWR-NE  PINRC-2X04  [R2X04]  79.38,50.8 180 bottom
PWR-NW  PINRC-2X04  [R2X04]  22.22,50.8 0 bottom
PWR-SE  PINRC-2X04  [R2X04]  79.38,6.35 180 bottom
PWR-SW  PINRC-2X04  [R2X04]  22.22,6.35 0 bottom
Q1  NX3008NBKMB  [SOT883(B)]  18.41,45.72 0 top
Q2  NX3008NBKMB  [SOT883(B)]  83.19,11.43 180 top
Q3  NX3008NBKMB  [SOT883(B)]  49.85,32.64 270 top
R1  200k  [0402-C]  23.49,35.24 180 bottom
R1A  [0603-C]  72.52,41.91 180 bottom
R1B  [0603-C]  67.44,41.91 180 bottom
R1C  [0603-C]  61.72,41.91 180 bottom
R1D  [0603-C]  56.64,41.91 180 bottom
R1E  [0603-C]  50.29,40.64 180 bottom
R1F  [0603-C]  45.21,40.64 180 bottom
R1G  [0603-C]  39.5,38.73 180 bottom
R1H  [0603-C]  34.42,38.73 180 bottom
R1J  [0603-C]  29.08,15.24 0 bottom
R1K  [0603-C]  34.16,15.24 0 bottom
R1L  [0603-C]  39.88,15.24 0 bottom
R1M  [0603-C]  44.96,15.24 0 bottom
R1N  [0603-C]  51.31,16.51 0 bottom
R1P  [0603-C]  56.39,16.51 0 bottom
R1Q  [0603-C]  62.1,18.41 0 bottom
R1R  [0603-C]  67.18,18.41 0 bottom
R1S  [0603-C]  8.25,10.67 270 bottom
R1T  [0603-C]  8.25,15.75 270 bottom
R1U  [0603-C]  8.25,20.83 270 bottom
R1V  [0603-C]  8.25,25.91 270 bottom
R1W  [0603-C]  8.25,32.26 270 bottom
R1X  [0603-C]  8.25,37.34 270 bottom
R1Y  [0603-C]  8.25,42.42 270 bottom
R1Z  [0603-C]  8.25,47.5 270 bottom
R2  200k  [0402-C]  78.1,21.91 0 bottom
R2A  [0402-C]  72.07,38.1 180 top
R2B  [0402-C]  66.99,38.1 180 top
R2C  [0402-C]  61.28,38.1 180 top
R2D  [0402-C]  56.2,38.1 180 top
R2E  [0402-C]  49.85,36.83 180 top
R2F  [0402-C]  44.77,36.83 180 top
R2G  [0402-C]  39.05,34.92 180 top
R2H  [0402-C]  33.97,34.92 180 top
R2J  [0402-C]  29.53,19.05 0 top
R2K  [0402-C]  34.61,19.05 0 top
R2L  [0402-C]  40.32,19.05 0 top
R2M  [0402-C]  45.4,19.05 0 top
R2N  [0402-C]  51.75,20.32 0 top
R2P  [0402-C]  56.83,20.32 0 top
R2Q  [0402-C]  62.55,22.23 0 top
R2R  [0402-C]  67.63,22.23 0 top
R2S  [0402-C]  4.45,11.11 90 top
R2T  [0402-C]  4.45,16.19 90 top
R2U  [0402-C]  4.45,21.27 90 top
R2V  [0402-C]  4.45,26.35 90 top
R2W  [0402-C]  4.45,32.7 90 top
R2X  [0402-C]  4.45,37.78 90 top
R2Y  [0402-C]  4.45,42.86 90 top
R2Z  [0402-C]  4.45,47.94 90 top
R3  [0402-C]  97.79,16.62 0 bottom
R4  50k  [0402-C]  95.25,14.42 0 bottom
R5  50k  [0402-C]  95.25,10.02 0 bottom
R6  50k  [0402-C]  95.25,8.92 0 bottom
R7  50k  [0402-C]  95.25,16.62 0 bottom
R8  [0805-C]  94.93,29.53 180 top
R9  [0805-C]  94.93,27.62 180 top
R10  243k  [0402-C]  92.07,33.34 90 top
R11  5k11  [0402-C]  91.12,33.34 270 top
R12  24k9  [0402-C]  89.85,33.34 90 top
R13  [0402-C]  88.9,16.83 180 bottom
R14  243k  [0402-C]  92.07,23.81 270 top
R15  5k11  [0402-C]  91.12,23.81 90 top
R16  24k9  [0402-C]  89.85,23.81 270 top
R19  [0402-C]  91.76,53.34 270 top
R20  [0402-C]  35.24,30.8 270 top
R21  [0402-C]  66.36,26.35 90 top
R22  [0402-C]  55.24,25.08 0 top
R23  [0402-C]  46.35,32.07 180 top
R24  5k11  [0402-C]  87.95,33.66 180 top
R25  5k11  [0402-C]  87.95,23.49 180 top
RN1  [4X0402ARV341]  20.95,35.88 270 bottom
RN2  [4X0402ARV341]  80.64,21.27 90 bottom
RN3  [EXB24V]  88.9,10.48 0 bottom
RN4  [EXB24V]  88.9,19.05 270 bottom
RN5  [EXB24V]  90.35,53.34 180 top
RN6  [EXB24V]  64.77,42.86 180 bottom
RN7  [EXB24V]  42.54,40 180 bottom
RN8  [EXB24V]  36.83,14.29 0 bottom
RN9  [EXB24V]  59.05,17.14 0 bottom
RN10  [EXB24V]  7.3,6.98 180 bottom
RN11  [EXB24V]  7.94,50.16 0 bottom
RN12  [EXB24V]  98.42,38.73 180 bottom
RN13  [EXB24V]  45.72,23.18 90 top
RN14  [EXB24V]  55.88,33.97 270 top
S1  SKSNLAE010  [SKSNLAE010]  10.79,56.9 180 bottom
SD1  MICRO-SD-2CD  [TF-MICRO-SD_PP2]  85.72,7.62 90 top
U1  PCA9306  [UDFN-8]  23.49,35.88 180 top
U2  PCA9306  [UDFN-8]  78.1,21.27 0 top
U3  IP4251CZ16-8-TTL  [SON40P135X330X55-17N]  92.39,6.35 270 bottom
U4  MCP9808  [DFN-8]  21.59,19.05 0 bottom
U5  BR24G04NUX  [DFN200X300X100-9N]  97.79,19.68 0 bottom
U6  MCP9808  [DFN-8]  80.01,38.1 180 bottom
U7  AP22966  [V-DFN3020-14]  66.36,13.33 90 top
U8  AP22966  [V-DFN3020-14]  35.24,43.81 270 top
U9  MIC94040  [MLF-4]  10.79,52.07 270 top
U10  NTLUD4C26N  [UDFN6]  87.95,30.8 90 top
U11  LTC4365  [DFN8]  96.2,32.38 270 top
U12  MIC94040  [MLF-4]  10.79,5.08 90 top
U13  PMEG2020CPAS  [DFN2020D-3]  91.12,28.57 180 top
U14  MIC94040  [MLF-4]  98.42,48.26 180 bottom
U15  LT1965  [DFN3X3_8LEAD]  80.64,28.57 180 bottom
U16  NTLUD4C26N  [UDFN6]  87.95,26.35 90 top
U17  PAC1934-LP  [WLCSP-16-LP]  92.39,19.68 0 bottom
U18  LTC4365  [DFN8]  96.2,24.77 90 top
U19  FT231-NSM  [QFN65P400X400X100-21N-NSM]  92.07,41.91 0 bottom
U20  TXS0102  [X2SON-8]  88.9,6.35 90 bottom
U21  FXLH1T45  [MICROPAK-6]  94.93,48.89 0 top
U22  PMEG2020CPAS  [DFN2020D-3]  98.42,45.72 180 bottom
U23  TXS0102  [X2SON-8]  81.28,33.34 90 top
U24  AP7312-3333FM-7  [DFN2018-6]  80.01,43.81 0 top
U25  AP7312-3333FM-7  [DFN2018-6]  21.59,13.33 180 top
U26  AP7312-3333FM-7  [DFN2018-6]  82.55,43.81 0 top
U27  AP7312-3333FM-7  [DFN2018-6]  19.05,13.33 180 top
U28  AP7312-3333FM-7  [DFN2018-6]  19.05,19.05 180 top
U29  AP7312-3333FM-7  [DFN2018-6]  82.55,38.1 0 top
U30  MCP46X2  [DFN-10]  72.71,41.27 90 top
U31  PAC1934-LP  [WLCSP-16-LP]  64.77,41.59 270 top
U32  MCP46X2  [DFN-10]  57.47,41.27 270 top
U33  MCP46X2  [DFN-10]  50.48,40 90 top
U34  PAC1934-LP  [WLCSP-16-LP]  42.54,39.37 270 top
U35  MCP46X2  [DFN-10]  35.24,38.1 270 top
U36  MCP46X2  [DFN-10]  28.89,15.88 270 top
U37  PAC1934-LP  [WLCSP-16-LP]  36.83,15.56 90 top
U38  MCP46X2  [DFN-10]  44.13,15.88 90 top
U39  MCP46X2  [DFN-10]  51.12,17.14 270 top
U40  PAC1934-LP  [WLCSP-16-LP]  59.05,17.78 90 top
U41  MCP46X2  [DFN-10]  66.36,19.05 90 top
U42  MCP46X2  [DFN-10]  7.62,10.48 0 top
U43  PAC1934-LP  [WLCSP-16-LP]  7.94,17.78 180 top
U44  MCP46X2  [DFN-10]  7.62,25.08 180 top
U45  MCP46X2  [DFN-10]  7.62,32.07 0 top
U46  PAC1934-LP  [WLCSP-16-LP]  7.94,39.37 180 top
U47  MCP46X2  [DFN-10]  7.62,46.67 180 top
UA  TPS82085  [MICROSIP]  73.09,38.1 270 bottom
UB  TPS82085  [MICROSIP]  68.01,38.1 270 bottom
UC  TPS82085  [MICROSIP]  62.29,38.1 270 bottom
UD  TPS82085  [MICROSIP]  57.21,38.1 270 bottom
UE  TPS82085  [MICROSIP]  50.86,36.83 270 bottom
UF  TPS82085  [MICROSIP]  45.78,36.83 270 bottom
UG  TPS82085  [MICROSIP]  40.07,34.92 270 bottom
UH  TPS82085  [MICROSIP]  34.99,34.92 270 bottom
UJ  TPS82085  [MICROSIP]  28.51,19.05 90 bottom
UK  TPS82085  [MICROSIP]  33.59,19.05 90 bottom
UL  TPS82085  [MICROSIP]  39.31,19.05 90 bottom
UM  TPS82085  [MICROSIP]  44.39,19.05 90 bottom
UN  TPS82085  [MICROSIP]  50.74,20.32 90 bottom
UP  TPS82085  [MICROSIP]  55.82,20.32 90 bottom
UQ  TPS82085  [MICROSIP]  61.53,22.23 90 bottom
UR  TPS82085  [MICROSIP]  66.61,22.23 90 bottom
US  TPS82085  [MICROSIP]  4.45,10.1 0 bottom
USB  5_USB_3S  [MICRO-AB-H-SMT]  101.6,41.27 90 top
UT  TPS82085  [MICROSIP]  4.45,15.18 0 bottom
UU  TPS82085  [MICROSIP]  4.45,20.26 0 bottom
UV  TPS82085  [MICROSIP]  4.45,25.34 0 bottom
UW  TPS82085  [MICROSIP]  4.45,31.69 0 bottom
UX  TPS82085  [MICROSIP]  4.45,36.77 0 bottom
UY  TPS82085  [MICROSIP]  4.45,41.85 0 bottom
UZ  TPS82085  [MICROSIP]  4.45,46.93 0 bottom
X1  PICO-SPOX-5  [PICO-SPOX-5]  97.79,28.57 90 bottom
ZED  µZ-FCI-CONONLY  [µZ-CONONLY]  50.8,28.57 180 bottom

## Library data of the parts
BETA ZED = microzed
C1 C1A C1B C1C C1D C1E C1F C1G C1H C1J C1K C1L C1M C1N C1P C1Q C1R C1S C1T C1U C1V C1W C1X C1Y C1Z C2 C2A C2B C2C C2D C2E C2F C2G C2H C2J C2K C2L C2M C2N C2P C2Q C2R C2S C2T C2U C2V C2W C2X C2Y C2Z C3-C45 C48-C91 DS1-DS4 FB1 FB2 FBA FBB FBC FBD FBE FBF FBG FBH FBJ FBK FBL FBM FBN FBP FBQ FBR FBS FBT FBU FBV FBW FBX FBY FBZ R1 R1A R1B R1C R1D R1E R1F R1G R1H R1J R1K R1L R1M R1N R1P R1Q R1R R1S R1T R1U R1V R1W R1X R1Y R1Z R2 R2A R2B R2C R2D R2E R2F R2G R2H R2J R2K R2L R2M R2N R2P R2Q R2R R2S R2T R2U R2V R2W R2X R2Y R2Z R3-R16 R19-R25 = generic-rcl
CN1 = array
CNW CSE = spx3819; MPN: SPX3819M5-L; OC_FARNELL: 1831948; OC_NEWARK: 23R9689; PACKAGE: SOT-23-5; SUPPLIER: EXAR
D1-D4 = pmeg2010beld
EXT = pinhead-2
F1-F8 = fiducial
IOC PMC = pic16f15386
LED = led
LOGO1 = ohw-logo
PB-NW PB-SE = df12
PM1-PM5 = pic16f1779
PWR-NE PWR-NW PWR-SE PWR-SW = pincon
Q1-Q3 = transistor
RN1 RN2 = resistor-dil; OC_FARNELL: unknown; OC_NEWARK: unknown
RN3-RN14 = array; OC_FARNELL: unknown; OC_NEWARK: unknown
S1 = switch
SD1 = micro-sd
U1 U2 = gtl2002
U3 = emifil; MPN: IP4251CZ16-8-TTL; OC_FARNELL: 1972684; OC_NEWARK: 58T9585; PACKAGE: SON-16; SUPPLIER: NXP
U4 U6 = lm75
U5 = eeprom
U7 U8 = AP22966
U9 U12 U14 = load_switch
U10 U16 = ntlud4c26n
U11 U18 = ltc4365
U13 U22 = pmeg2020cpas
U15 = lt1965
U17 U31 U34 U37 U40 U43 U46 = pac1934
U19 = ft23x
U20 U21 U23 = lvltrans
U24-U29 = ldo
U30 U32 U33 U35 U36 U38 U39 U41 U42 U44 U45 U47 = digipot
UA UB UC UD UE UF UG UH UJ UK UL UM UN UP UQ UR US UT UU UV UW UX UY UZ = TPS82085
USB = usb; TE: 1981584
X1 = pico-spox

## Nets
!ALERT: PM5.22 U17.C3 U17.D3
!MCLR_1: PM1.16 PM2.36
!MCLR_2: PM2.16 PM3.36
!MCLR_3: PM3.16 PMC.2
!MCLR_4: PM4.16 PMC.1
!MCLR_5: PM4.36 PM5.16
!MCLR_C: PMC.26 Q3.3
!RESET: IOC.27 U19.11
A_!RST: PB-NW.1 Q1.3
A_RST [LVDS]: PM2.25 Q1.1
A_SCL: PB-NW.2 RN1.1 U1.3
A_SDA: PB-NW.4 RN1.2 U1.4
ANY_IN: C44.1 U13.3 U13.4 U15.6 U15.7 U15.8
B_!RST: PB-SE.1 Q2.3
B_RST [LVDS]: PM5.25 Q2.1
B_SCL: PB-SE.2 RN2.1 U2.3
B_SDA: PB-SE.4 RN2.2 U2.4
BACK_1: PM1.13 PMC.10
BACK_5: PM5.13 PMC.18
BANK13_00_N [LVDS]: BETA.89 ZED.89
BANK13_00_P [LVDS]: BETA.87 ZED.87
BANK13_01_N [LVDS]: BETA.90 ZED.90
BANK13_01_P [LVDS]: BETA.88 ZED.88
BANK13_02_N [LVDS]: BETA.93 ZED.93
BANK13_02_P [LVDS]: BETA.91 ZED.91
BANK13_03_N [LVDS]: BETA.94 ZED.94
BANK13_03_P [LVDS]: BETA.92 ZED.92
BANK13_04_N [LVDS]: BETA.195 ZED.195
BANK13_04_P [LVDS]: BETA.193 ZED.193
BANK13_05_N: BETA.196 ZED.196
BANK13_05_P: BETA.194 ZED.194
BANK13_06_N [LVDS]: BETA.199 ZED.199
BANK13_06_P [LVDS]: BETA.197 ZED.197
BANK13_SE_0: BETA.200 ZED.200
BETA_5V: C1A.1 C1B.1 C1C.1 C1D.1 C1E.1 C1F.1 C1G.1 C1H.1 C1J.1 C1K.1 C1L.1 C1M.1 C1N.1 C1P.1 C1Q.1 C1R.1 C1S.1 C1T.1 C1U.1 C1V.1 C1W.1 C1X.1 C1Y.1 C1Z.1 C5.1 C6.1 C7.1 C24.1 C25.1 C40.1 C41.1 C80.1 C81.1 C82.1 C83.1 C84.1 C85.1 C86.1 C87.1 C88.1 C89.1 C90.1 C91.1 D1.A RN4.3 RN4.4 RN6.3 RN6.4 RN7.3 RN7.4 RN8.3 RN8.4 RN9.3 RN9.4 RN10.3 RN10.4 RN11.3 RN11.4 U4.5 U4.6 U4.7 U4.8 U5.8 U6.5 U6.6 U6.7 U6.8 U7.1 U7.3 U7.5 U8.1 U8.3 U8.5 U10.6 U10.D1 U11.6 U17.A4 U17.B2 U17.B3 U17.C2 U30.1 U30.10 U31.A4 U31.B2 U31.B3 U31.C2 U32.9 U32.10 U33.1 U33.10 U34.A4 U34.B2 U34.B3 U34.C2 U35.9 U35.10 U36.1 U36.10 U37.A4 U37.B2 U37.B3 U37.C2 U38.9 U38.10 U39.1 U39.10 U40.A4 U40.B2 U40.B3 U40.C2 U41.9 U41.10 U42.1 U42.10 U43.A4 U43.B2 U43.B3 U43.C2 U44.9 U44.10 U45.1 U45.10 U46.A4 U46.B2 U46.B3 U46.C2 U47.9 U47.10 UA.3 UA.4 UB.3 UB.4 UC.3 UC.4 UD.3 UD.4 UE.3 UE.4 UF.3 UF.4 UG.3 UG.4 UH.3 UH.4 UJ.3 UJ.4 UK.3 UK.4 UL.3 UL.4 UM.3 UM.4 UN.3 UN.4 UP.3 UP.4 UQ.3 UQ.4 UR.3 UR.4 US.3 US.4 UT.3 UT.4 UU.3 UU.4 UV.3 UV.4 UW.3 UW.4 UX.3 UX.4 UY.3 UY.4 UZ.3 UZ.4
BETA_!FAULT: IOC.40 U11.7
BETA_!SHDN: IOC.37 U11.8
BETA_GATE: R24.1 U10.2 U10.5 U11.5
BETA_IN: R8.2 R10.1 U10.3 U10.D2 U11.4 U13.2 U17.B1
BETA_OV: R11.2 R12.1 U11.2
BETA_SUP: C78.1 R8.1 U17.A1 X1.4 X1.4A
BETA_UV: R10.2 R11.1 U11.3
BTN: PM1.20 S1.2
CBUS3: IOC.28 U19.16
CC_!MCLR: IOC.20 U19.7
CC_JX1: IOC.8 U21.3
CC_PCLK: IOC.18 U19.15
CC_PDAT: IOC.19 U19.14
CC_SE_0: IOC.47 U20.6
CC_SE_1: IOC.48 U20.7
CD: SD1.CD1 SD1.CD2 U3.1
CD': IOC.26 U3.16
CLK: SD1.5 U3.5
CMD: R4.2 SD1.3 U3.4
CNW_BYP: C67.1 CNW.4
CNW_EN: CNW.3 PM1.25
CSE_BYP: C70.1 CSE.4
CSE_EN: CSE.3 PM5.36
CSO_NE_V: BETA.7 FBX.2 PM1.37
CSO_NW_V: FBF.2 PM3.32 PWR-NW.6
CSO_SE_V: FBP.2 PM4.32 PWR-SE.6
CSO_SW_V: BETA.112 FBU.2 PM1.2
D0: IOC.5 U19.17
D1: IOC.45 U19.1
D2: IOC.3 U19.19
D3: IOC.2 U19.6
D4: IOC.4 U19.18
D5: IOC.43 U19.4
D6: IOC.42 U19.5
D7: IOC.44 U19.2
DAT0: R5.2 SD1.7 U3.6
DAT1: R6.2 SD1.8 U3.7
DAT2: R7.2 SD1.1 U3.2
DAT3: SD1.2 U3.3
DM: RN12.3 U19.9
DP: RN12.4 U19.8
DS1: PM3.30 R20.1
DS2: PM4.30 R21.1
DS3: PMC.6 R22.1
DS4: PMC.28 R23.1
DXP_0_N: BETA.100 ZED.100
DXP_0_P: BETA.98 ZED.98
E_B_SCL: PM5.31 RN2.4 U2.6
E_B_SDA: PM5.30 RN2.3 U2.5
E_I2C_EN: PM5.17 U24.2
E_I2C_V: C50.1 PWR-NE.6 U24.6
E_SPI_EN: PM5.5 U26.2
E_SPI_V: C56.1 PWR-NE.8 U26.6
E_VE: FBM.2 PM5.21 PWR-SE.4
E_VE_CV: PB-SE.20 PM5.18
E_VE_OV: PB-SE.9 PM5.10
E_VE_UV: PB-SE.11 PM5.33
EN_3: PM2.24 U8.2
EN_4: PM2.23 U8.4
EN_5: PM5.24 U7.2
EN_6: PM5.23 U7.4
EN_A: PM4.40 UA.1
EN_B: PM4.2 UB.1
EN_C: PM4.10 UC.1
EN_D: PM4.12 UD.1
EN_E: PM3.18 UE.1
EN_F: PM3.20 UF.1
EN_G: PM3.22 UG.1
EN_H: PM3.33 UH.1
EN_J: PM3.40 UJ.1
EN_K: PM3.2 UK.1
EN_L: PM3.10 UL.1
EN_M: PM3.12 UM.1
EN_N: PM4.18 UN.1
EN_P: PM4.20 UP.1
EN_Q: PM4.22 UQ.1
EN_R: PM4.33 UR.1
EN_S: PM1.17 US.1
EN_T: PM1.5 UT.1
EN_U: PM1.4 UU.1
EN_V: PM1.36 UV.1
EN_W: PM1.34 UW.1
EN_X: PM1.30 UX.1
EN_Y: PM1.28 UY.1
EN_Z: PM1.21 UZ.1
EXTA: EXT.2 IOC.10
EXTB: EXT.4 IOC.9
F3: IOC.39
FAN_SUP: EXT.3 U14.1
FAN_SUP_EN: IOC.1 U14.4
FB_A: R2A.2 U30.6 UA.7
FB_B: R2B.2 U30.7 UB.7
FB_C: R2C.2 U32.6 UC.7
FB_D: R2D.2 U32.7 UD.7
FB_E: R2E.2 U33.6 UE.7
FB_F: R2F.2 U33.7 UF.7
FB_G: R2G.2 U35.6 UG.7
FB_H: R2H.2 U35.7 UH.7
FB_J: R2J.2 U36.6 UJ.7
FB_K: R2K.2 U36.7 UK.7
FB_L: R2L.2 U38.6 UL.7
FB_M: R2M.2 U38.7 UM.7
FB_N: R2N.2 U39.6 UN.7
FB_P: R2P.2 U39.7 UP.7
FB_Q: R2Q.2 U41.6 UQ.7
FB_R: R2R.2 U41.7 UR.7
FB_S: R2S.2 U42.6 US.7
FB_T: R2T.2 U42.7 UT.7
FB_U: R2U.2 U44.6 UU.7
FB_V: R2V.2 U44.7 UV.7
FB_W: R2W.2 U45.6 UW.7
FB_X: R2X.2 U45.7 UX.7
FB_Y: R2Y.2 U47.6 UY.7
FB_Z: R2Z.2 U47.7 UZ.7
GND: BETA.15 BETA.16 BETA.21 BETA.22 BETA.27 BETA.28 BETA.33 BETA.34 BETA.39 BETA.40 BETA.45 BETA.46 BETA.51 BETA.52 BETA.65 BETA.66 BETA.71 BETA.72 BETA.77 BETA.85 BETA.86 BETA.95 BETA.96 BETA.115 BETA.116 BETA.121 BETA.122 BETA.127 BETA.128 BETA.133 BETA.134 BETA.139 BETA.140 BETA.145 BETA.146 BETA.151 BETA.152 BETA.165 BETA.166 BETA.171 BETA.172 BETA.177 BETA.185 BETA.186 BETA.191 BETA.192 C1.2 C1A.2 C1B.2 C1C.2 C1D.2 C1E.2 C1F.2 C1G.2 C1H.2 C1J.2 C1K.2 C1L.2 C1M.2 C1N.2 C1P.2 C1Q.2 C1R.2 C1S.2 C1T.2 C1U.2 C1V.2 C1W.2 C1X.2 C1Y.2 C1Z.2 C2.2 C2A.2 C2B.2 C2C.2 C2D.2 C2E.2 C2F.2 C2G.2 C2H.2 C2J.2 C2K.2 C2L.2 C2M.2 C2N.2 C2P.2 C2Q.2 C2R.2 C2S.2 C2T.2 C2U.2 C2V.2 C2W.2 C2X.2 C2Y.2 C2Z.2 C3.2 C4.2 C5.2 C6.2 C7.2 C8.2 C9.2 C10.2 C11.2 C12.2 C13.2 C14.2 C15.2 C16.2 C17.2 C18.2 C19.2 C20.2 C21.2 C22.2 C23.2 C24.2 C25.2 C26.2 C27.2 C28.2 C29.2 C30.2 C31.2 C32.2 C33.2 C34.2 C35.2 C36.2 C37.2 C38.2 C39.2 C40.2 C41.2 C42.2 C43.2 C44.2 C45.2 C48.2 C49.2 C50.2 C51.2 C52.2 C53.2 C54.2 C55.2 C56.2 C57.2 C58.2 C59.2 C60.2 C61.2 C62.2 C63.2 C64.2 C65.2 C66.2 C67.2 C68.2 C69.2 C70.2 C71.2 C72.2 C73.2 C74.2 C75.2 C76.2 C77.2 C78.2 C79.2 C80.2 C81.2 C82.2 C83.2 C84.2 C85.2 C86.2 C87.2 C88.2 C89.2 C90.2 C91.2 CN1.1 CN1.2 CNW.2 CSE.2 DS1.2 DS2.2 DS3.2 DS4.2 EXT.1 IOC.6 IOC.31 IOC.EP PB-NW.6 PB-SE.6 PM1.6 PM1.27 PM1.EP PM2.6 PM2.27 PM2.EP PM3.6 PM3.27 PM3.EP PM4.6 PM4.27 PM4.EP PM5.6 PM5.27 PM5.EP PMC.5 PMC.16 PMC.EP PWR-NE.2 PWR-NE.4 PWR-NW.1 PWR-NW.3 PWR-SE.1 PWR-SE.3 PWR-SW.2 PWR-SW.4 Q1.2 Q2.2 Q3.2 R2A.1 R2B.1 R2C.1 R2D.1 R2E.1 R2F.1 R2G.1 R2H.1 R2J.1 R2K.1 R2L.1 R2M.1 R2N.1 R2P.1 R2Q.1 R2R.1 R2S.1 R2T.1 R2U.1 R2V.1 R2W.1 R2X.1 R2Y.1 R2Z.1 R12.2 R16.2 S1.1 SD1.6 SD1.MT1 SD1.MT2 U1.1 U2.1 U3.17 U4.4 U4.EP U5.1 U5.2 U5.3 U5.4 U5.7 U5.EP U6.4 U6.EP U7.8 U7.EP U8.8 U8.EP U9.2 U11.1 U11.EP U12.2 U14.2 U15.4 U15.5 U15.9 U17.B4 U18.1 U18.EP U19.3 U19.13 U19.EP U20.4 U21.2 U23.4 U24.4 U24.10 U25.4 U25.10 U26.4 U26.10 U27.4 U27.10 U28.4 U28.10 U29.4 U29.10 U30.4 U30.9 U30.EP U31.B4 U32.1 U32.4 U32.EP U33.4 U33.9 U33.EP U34.B4 U35.1 U35.4 U35.EP U36.4 U36.9 U36.EP U37.B4 U38.1 U38.4 U38.EP U39.4 U39.9 U39.EP U40.B4 U41.1 U41.4 U41.EP U42.4 U42.9 U42.EP U43.B4 U44.1 U44.4 U44.EP U45.4 U45.9 U45.EP U46.B4 U47.1 U47.4 U47.EP UA.5 UA.6 UA.EP UB.5 UB.6 UB.EP UC.5 UC.6 UC.EP UD.5 UD.6 UD.EP UE.5 UE.6 UE.EP UF.5 UF.6 UF.EP UG.5 UG.6 UG.EP UH.5 UH.6 UH.EP UJ.5 UJ.6 UJ.EP UK.5 UK.6 UK.EP UL.5 UL.6 UL.EP UM.5 UM.6 UM.EP UN.5 UN.6 UN.EP UP.5 UP.6 UP.EP UQ.5 UQ.6 UQ.EP UR.5 UR.6 UR.EP US.5 US.6 US.EP USB.5 UT.5 UT.6 UT.EP UU.5 UU.6 UU.EP UV.5 UV.6 UV.EP UW.5 UW.6 UW.EP UX.5 UX.6 UX.EP UY.5 UY.6 UY.EP UZ.5 UZ.6 UZ.EP X1.1 X1.1A X1.5 X1.5A ZED.15 ZED.16 ZED.21 ZED.22 ZED.27 ZED.28 ZED.33 ZED.34 ZED.39 ZED.40 ZED.45 ZED.46 ZED.51 ZED.52 ZED.65 ZED.66 ZED.71 ZED.72 ZED.77 ZED.85 ZED.86 ZED.95 ZED.96 ZED.115 ZED.116 ZED.121 ZED.122 ZED.127 ZED.128 ZED.133 ZED.134 ZED.139 ZED.140 ZED.145 ZED.146 ZED.151 ZED.152 ZED.165 ZED.166 ZED.171 ZED.172 ZED.177 ZED.185 ZED.186 ZED.191 ZED.192
IOE_V: FBN.2 PM4.35 PWR-SE.5 RN2.7 RN2.8 U2.2
IOW_V: FBE.2 PM3.35 PWR-NW.5 RN1.7 RN1.8 U1.2
JTAG_EN: PM2.5 U27.2
JTAG_V: C59.1 PWR-SW.8 U27.6
JX1_00_N [LVDS]: BETA.13 ZED.13
JX1_00_P [LVDS]: BETA.11 ZED.11
JX1_01_N [LVDS]: BETA.14 ZED.14
JX1_01_P [LVDS]: BETA.12 ZED.12
JX1_02_N [LVDS]: BETA.19 ZED.19
JX1_02_P [LVDS]: BETA.17 ZED.17
JX1_03_N [LVDS]: BETA.20 ZED.20
JX1_03_P [LVDS]: BETA.18 ZED.18
JX1_04_N [LVDS]: BETA.25 ZED.25
JX1_04_P [LVDS]: BETA.23 ZED.23
JX1_05_N: BETA.26 ZED.26
JX1_05_P: BETA.24 ZED.24
JX1_06_N [LVDS]: BETA.31 ZED.31
JX1_06_P [LVDS]: BETA.29 ZED.29
JX1_07_N [LVDS]: BETA.32 ZED.32
JX1_07_P [LVDS]: BETA.30 ZED.30
JX1_08_N: BETA.37 ZED.37
JX1_08_P: BETA.35 ZED.35
JX1_09_N [LVDS]: BETA.38 ZED.38
JX1_09_P [LVDS]: BETA.36 ZED.36
JX1_10_N [LVDS]: BETA.43 ZED.43
JX1_10_P [LVDS]: BETA.41 ZED.41
JX1_11_N [LVDS]: BETA.44 ZED.44
JX1_11_P [LVDS]: BETA.42 ZED.42
JX1_12_N [LVDS]: BETA.49 ZED.49
JX1_12_P [LVDS]: BETA.47 ZED.47
JX1_13_N [LVDS]: BETA.50 ZED.50
JX1_13_P [LVDS]: BETA.48 ZED.48
JX1_14_N [LVDS]: BETA.55 ZED.55
JX1_14_P [LVDS]: BETA.53 ZED.53
JX1_15_N: BETA.56 ZED.56
JX1_15_P: BETA.54 ZED.54
JX1_16_N [LVDS]: BETA.63 ZED.63
JX1_16_P [LVDS]: BETA.61 ZED.61
JX1_17_N [LVDS]: BETA.64 ZED.64
JX1_17_P [LVDS]: BETA.62 ZED.62
JX1_18_N [LVDS]: BETA.69 ZED.69
JX1_18_P [LVDS]: BETA.67 ZED.67
JX1_19_N [LVDS]: BETA.70 ZED.70
JX1_19_P [LVDS]: BETA.68 ZED.68
JX1_20_N: BETA.75 ZED.75
JX1_20_P: BETA.73 ZED.73
JX1_21_N: BETA.76 ZED.76
JX1_21_P: BETA.74 ZED.74
JX1_22_N: BETA.83 ZED.83
JX1_22_P: BETA.81 ZED.81
JX1_23_N [LVDS]: BETA.84 ZED.84
JX1_23_P [LVDS]: BETA.82 ZED.82
JX1_DIR: IOC.38 U21.5
JX1_SE_0: BETA.9 ZED.9
JX1_SE_1: BETA.10 U21.4 ZED.10
JX2_00_N [LVDS]: BETA.119 ZED.119
JX2_00_P [LVDS]: BETA.117 ZED.117
JX2_01_N [LVDS]: BETA.120 ZED.120
JX2_01_P [LVDS]: BETA.118 ZED.118
JX2_02_N [LVDS]: BETA.125 ZED.125
JX2_02_P [LVDS]: BETA.123 ZED.123
JX2_03_N [LVDS]: BETA.126 ZED.126
JX2_03_P [LVDS]: BETA.124 ZED.124
JX2_04_N [LVDS]: BETA.131 ZED.131
JX2_04_P [LVDS]: BETA.129 ZED.129
JX2_05_N [LVDS]: BETA.132 ZED.132
JX2_05_P [LVDS]: BETA.130 ZED.130
JX2_06_N [LVDS]: BETA.137 ZED.137
JX2_06_P [LVDS]: BETA.135 ZED.135
JX2_07_N [LVDS]: BETA.138 ZED.138
JX2_07_P [LVDS]: BETA.136 ZED.136
JX2_08_N [LVDS]: BETA.143 ZED.143
JX2_08_P [LVDS]: BETA.141 ZED.141
JX2_09_N [LVDS]: BETA.144 ZED.144
JX2_09_P [LVDS]: BETA.142 ZED.142
JX2_10_N [LVDS]: BETA.149 ZED.149
JX2_10_P [LVDS]: BETA.147 ZED.147
JX2_11_N [LVDS]: BETA.150 ZED.150
JX2_11_P [LVDS]: BETA.148 ZED.148
JX2_12_N [LVDS]: BETA.155 ZED.155
JX2_12_P [LVDS]: BETA.153 ZED.153
JX2_13_N [LVDS]: BETA.156 ZED.156
JX2_13_P [LVDS]: BETA.154 ZED.154
JX2_14_N: BETA.163 ZED.163
JX2_14_P: BETA.161 ZED.161
JX2_15_N [LVDS]: BETA.164 ZED.164
JX2_15_P [LVDS]: BETA.162 ZED.162
JX2_16_N [LVDS]: BETA.169 ZED.169
JX2_16_P [LVDS]: BETA.167 ZED.167
JX2_17_N [LVDS]: BETA.170 ZED.170
JX2_17_P [LVDS]: BETA.168 ZED.168
JX2_18_N [LVDS]: BETA.175 ZED.175
JX2_18_P [LVDS]: BETA.173 ZED.173
JX2_19_N [LVDS]: BETA.176 ZED.176
JX2_19_P [LVDS]: BETA.174 ZED.174
JX2_20_N [LVDS]: BETA.183 ZED.183
JX2_20_P [LVDS]: BETA.181 ZED.181
JX2_21_N [LVDS]: BETA.184 ZED.184
JX2_21_P [LVDS]: BETA.182 ZED.182
JX2_22_N: BETA.189 ZED.189
JX2_22_P: BETA.187 ZED.187
JX2_23_N [LVDS]: BETA.190 ZED.190
JX2_23_P [LVDS]: BETA.188 ZED.188
JX2_SE_0: U20.3 ZED.113
JX2_SE_1: U20.2 ZED.114
LED_B: IOC.11 RN5.3
LED_G: IOC.33 R19.2
LED_G': LED.3 R19.1
LED_R: IOC.32 RN5.4
MEAS_A: FBA.1 R1A.2 U30.5 U31.B1
MEAS_B: FBB.1 R1B.2 U30.8 U31.A2
MEAS_C: FBC.1 R1C.2 U31.D2 U32.5
MEAS_D: FBD.1 R1D.2 U31.C1 U32.8
MEAS_E: FBE.1 R1E.2 U33.5 U34.B1
MEAS_F: FBF.1 R1F.2 U33.8 U34.A2
MEAS_G: FBG.1 R1G.2 U34.D2 U35.5
MEAS_H: FBH.1 R1H.2 U34.C1 U35.8
MEAS_J: FBJ.1 R1J.2 U36.5 U37.B1
MEAS_K: FBK.1 R1K.2 U36.8 U37.A2
MEAS_L: FBL.1 R1L.2 U37.D2 U38.5
MEAS_M: FBM.1 R1M.2 U37.C1 U38.8
MEAS_N: FBN.1 R1N.2 U39.5 U40.B1
MEAS_P: FBP.1 R1P.2 U39.8 U40.A2
MEAS_Q: FBQ.1 R1Q.2 U40.D2 U41.5
MEAS_R: FBR.1 R1R.2 U40.C1 U41.8
MEAS_S: FBS.1 R1S.2 U42.5 U43.B1
MEAS_T: FBT.1 R1T.2 U42.8 U43.A2
MEAS_U: FBU.1 R1U.2 U43.D2 U44.5
MEAS_V: FBV.1 R1V.2 U43.C1 U44.8
MEAS_W: FBW.1 R1W.2 U45.5 U46.B1
MEAS_X: FBX.1 R1X.2 U45.8 U46.A2
MEAS_Y: FBY.1 R1Y.2 U46.D2 U47.5
MEAS_Z: FBZ.1 R1Z.2 U46.C1 U47.8
MIX_SUP: U14.3 U22.3 U22.4
N$1: DS2.1 R21.2
N$2: DS4.1 R23.2
N$3: C3.1 C4.1 FB1.2 R4.1 R5.1 R6.1 R7.1 SD1.4
N$4 [LVDS]: LED.4 RN5.1
N$7 [LVDS]: C76.1 R24.2
N$8 [LVDS]: LED.5 RN5.2
N$9: BETA.4
N$10: BETA.2
N$11: BETA.1
N$12: CN1.3 RN12.2 USB.2
N$13: BETA.3
N$14 [LVDS]: C77.1 R25.2
N$17: CN1.4 RN12.1 USB.3
N$18: U10.1 U10.4
N$23: C26.1 U8.7
N$24: C27.1 U8.9
N$25: C8.1 U7.7
N$26: C9.1 U7.9
N$28: DS1.1 R20.2
N$29: DS3.1 R22.2
N$32: C1.1 R1.2 U1.7 U1.8
N$33: C2.1 R2.2 U2.7 U2.8
N$38: U16.1 U16.4
N_CHK_V: C68.1 CNW.5 PB-NW.13
N_I2C_EN: PM5.4 U26.3
N_I2C_V: C55.1 PWR-NE.7 U26.5
N_SPI_EN: PM5.12 U24.3
N_SPI_V: C49.1 PWR-NE.5 U24.5
N_VE: FBA.2 PWR-NE.3
N_VE_CV: PB-NW.18 PM2.9
N_VE_OV: PB-NW.7 PM2.8
N_VE_RS: PB-NW.8 PM2.11
N_VE_UV: PB-NW.19 PM2.19
N_VN: FBB.2 PWR-NE.1
N_VN_CV: PB-NW.16 PM2.35
N_VN_OV: PB-NW.5 PM2.29
N_VN_RS: PB-NW.12 PM2.34
N_VN_UV: PB-NW.17 PM2.20
N_VW: FBC.2 PWR-NW.2
N_VW_CV: PB-NW.14 PM2.40
N_VW_OV: PB-NW.3 PM2.28
N_VW_RS: PB-NW.10 PM2.39
N_VW_UV: PB-NW.15 PM2.32
NC$1: BETA.113
NC$2: BETA.114
OS2: U6.3
OS3: U4.3
PCIE_I2C_EN: PM2.2 U28.3
PCIE_I2C_V: BETA.198 C61.1 U28.5
PCIE_N_5V: BETA.59 BETA.60 C29.1 U8.10
PCIE_N_V: BETA.79 BETA.80 FBW.2 PM1.11
PCIE_N_VCCIO: BETA.78 U9.1
PCIE_NIO_EN: PM1.23 U9.4
PCIE_S_5V: BETA.159 BETA.160 C10.1 U7.6
PCIE_S_V: BETA.179 BETA.180 FBV.2 PM1.3
PCIE_S_VCCIO: BETA.178 U12.1
PCIE_SIO_EN: PM1.24 U12.4
PCLK_1: PM1.14 PM2.38
PCLK_2: PM2.14 PM3.38
PCLK_3: PM3.14 PMC.11
PCLK_4: PM4.14 PMC.14
PCLK_5: PM4.38 PM5.14
PCLK_C: PMC.24 U23.7
PDAT_1: PM1.15 PM2.37
PDAT_2: PM2.15 PM3.37
PDAT_3: PM3.15 PMC.15
PDAT_4: PM4.15 PMC.19
PDAT_5: PM4.37 PM5.15
PDAT_C: PMC.25 U23.6
PEX_N_V: BETA.57 BETA.58 C28.1 U8.6
PEX_S_V: BETA.157 BETA.158 C11.1 U7.10
PG_1V8: RN13.2 ZED.110
PG_1V8': PM3.4 RN13.3
PG_A: PM4.39 UA.2
PG_B: PM4.1 UB.2
PG_C: PM4.8 UC.2
PG_D: PM4.11 UD.2
PG_E: PM3.17 UE.2
PG_F: PM3.19 UF.2
PG_G: PM3.21 UG.2
PG_H: PM3.31 UH.2
PG_J: PM3.39 UJ.2
PG_K: PM3.1 UK.2
PG_L: PM3.8 UL.2
PG_M: PM3.11 UM.2
PG_MODULE: RN13.1 ZED.111
PG_MODULE': PM3.5 RN13.4
PG_N: PM4.17 UN.2
PG_P: PM4.19 UP.2
PG_Q: PM4.21 UQ.2
PG_R: PM4.31 UR.2
PG_S: PM1.12 US.2
PG_T: PM1.8 UT.2
PG_U: PM1.9 UU.2
PG_V: PM1.10 UV.2
PG_W: PM1.33 UW.2
PG_X: PM1.29 UX.2
PG_Y: PM1.19 UY.2
PG_Z: PM1.22 UZ.2
PM_MCLR [LVDS]: IOC.29 Q3.1
PM_PCLK: IOC.17 U23.2
PM_PDAT: IOC.16 U23.3
PMOD_D0: U3.10 ZED.101
PMOD_D1: U3.11 ZED.102
PMOD_D2: U3.13 ZED.103
PMOD_D3: U3.12 ZED.104
PMOD_D6: U3.15 ZED.107
PMOD_D7: U3.14 ZED.108
PMOD_SCL: IOC.34 RN3.1 ZED.105
PMOD_SDA: IOC.35 RN3.2 ZED.106
RA5_2: PM2.22
RC7_2: PM2.1
RFAB_E_V: FBR.2 PM4.13 PWR-SE.8
RFAB_W_V: FBH.2 PM3.13 PWR-NW.8
RFE_V: FBQ.2 PM4.9 PWR-SE.7
RFW_V: FBG.2 PM3.9 PWR-NW.7
S_CHK_V: C71.1 CSE.5 PB-SE.13
S_I2C_EN: PM2.4 U27.3
S_I2C_V: C58.1 PWR-SW.7 U27.5
S_SPI_EN: PM2.12 U25.3
S_SPI_V: C52.1 PWR-SW.5 U25.5
S_VE: FBL.2 PWR-SE.2
S_VE_CV: PB-SE.14 PM5.40
S_VE_OV: PB-SE.3 PM5.28
S_VE_RS: PB-SE.10 PM5.39
S_VE_UV: PB-SE.15 PM5.32
S_VS: FBK.2 PWR-SW.1
S_VS_CV: PB-SE.16 PM5.35
S_VS_OV: PB-SE.5 PM5.29
S_VS_RS: PB-SE.12 PM5.34
S_VS_UV: PB-SE.17 PM5.20
S_VW: FBJ.2 PWR-SW.3
S_VW_CV: PB-SE.18 PM5.9
S_VW_OV: PB-SE.7 PM5.8
S_VW_RS: PB-SE.8 PM5.11
S_VW_UV: PB-SE.19 PM5.19
SCL1: PMC.20 RN6.2 U6.2 U30.2 U31.C4 U32.2
SCL2: PMC.23 RN7.2 U33.2 U34.C4 U35.2
SCL3: PMC.9 RN8.2 U4.2 U36.2 U37.C4 U38.2
SCL4: PMC.13 RN9.2 U39.2 U40.C4 U41.2
SCL5: PM1.1 RN10.1 U42.2 U43.C4 U44.2
SCL6: PM1.32 RN11.1 U45.2 U46.C4 U47.2
SCL7: PM5.1 RN4.1 U5.6 U17.C4
SD_MEAS [LVDS]: FB1.1 R3.2 U17.D1
SD_V: C64.1 R3.1 U17.C1 U29.5
SD_V_EN: PM5.2 U29.3
SDA1: PMC.21 RN6.1 U6.1 U30.3 U31.D4 U32.3
SDA2: PMC.22 RN7.1 U33.3 U34.D4 U35.3
SDA3: PMC.8 RN8.1 U4.1 U36.3 U37.D4 U38.3
SDA4: PMC.12 RN9.1 U39.3 U40.D4 U41.3
SDA5: PM1.39 RN10.2 U42.3 U43.D4 U44.3
SDA6: PM1.31 RN11.2 U45.3 U46.D4 U47.3
SDA7: PM5.38 RN4.2 U5.5 U17.D4
SENSE: R13.2 U17.D2 X1.3 X1.3A
SIGNAL [LVDS]: PM5.37 R13.1
UNUSED_EN: PM2.3 U28.2
UNUSED_V: C62.1 U28.6
V33: C45.1 D2.A D3.A U15.1 U15.2 U15.3 U22.1
VBAT: ZED.7
VBUS: FB2.2 USB.1
VCC: C65.1 C74.1 C75.1 D3.C IOC.7 IOC.30 LED.1 LED.2 LED.6 LED.7 RN3.3 RN3.4 U19.20 U20.8 U21.1 U23.1 U23.5 U29.6
VCC_EN: PM5.3 U29.2
VCCO_13 [LVDS]: FBT.2 PM1.38 ZED.198
VCCO_34: FBZ.2 PM1.35 U9.3 U21.6 ZED.78 ZED.79 ZED.80
VCCO_35: FBS.2 PM1.40 U12.3 U20.1 U20.5 ZED.178 ZED.179 ZED.180
VLDO: C48.1 C51.1 C54.1 C57.1 C60.1 C63.1 C66.1 C69.1 CNW.1 CSE.1 D4.C PM1.18 U24.1 U25.1 U26.1 U27.1 U28.1 U29.1
VLDO': D4.A FBY.2
VOUT_A: C2A.1 R1A.1 U31.A1 UA.8
VOUT_B: C2B.1 R1B.1 U31.A3 UB.8
VOUT_C: C2C.1 R1C.1 U31.D3 UC.8
VOUT_D: C2D.1 R1D.1 U31.D1 UD.8
VOUT_E: C2E.1 R1E.1 U34.A1 UE.8
VOUT_F: C2F.1 R1F.1 U34.A3 UF.8
VOUT_G: C2G.1 R1G.1 U34.D3 UG.8
VOUT_H: C2H.1 R1H.1 U34.D1 UH.8
VOUT_J: C2J.1 R1J.1 U37.A1 UJ.8
VOUT_K: C2K.1 R1K.1 U37.A3 UK.8
VOUT_L: C2L.1 R1L.1 U37.D3 UL.8
VOUT_M: C2M.1 R1M.1 U37.D1 UM.8
VOUT_N: C2N.1 R1N.1 U40.A1 UN.8
VOUT_P: C2P.1 R1P.1 U40.A3 UP.8
VOUT_Q: C2Q.1 R1Q.1 U40.D3 UQ.8
VOUT_R: C2R.1 R1R.1 U40.D1 UR.8
VOUT_S: C2S.1 R1S.1 U43.A1 US.8
VOUT_T: C2T.1 R1T.1 U43.A3 UT.8
VOUT_U: C2U.1 R1U.1 U43.D3 UU.8
VOUT_V: C2V.1 R1V.1 U43.D1 UV.8
VOUT_W: C2W.1 R1W.1 U46.A1 UW.8
VOUT_X: C2X.1 R1X.1 U46.A3 UX.8
VOUT_Y: C2Y.1 R1Y.1 U46.D3 UY.8
VOUT_Z: C2Z.1 R1Z.1 U46.D1 UZ.8
VP_0_N: BETA.99 RN14.2 ZED.99
VP_0_N': PM4.25 RN14.3
VP_0_P: BETA.97 RN14.1 ZED.97
VP_0_P': PM4.24 RN14.4
VPC: C12.1 C13.1 C14.1 C15.1 C16.1 C17.1 C18.1 C19.1 C20.1 C21.1 C22.1 C23.1 C30.1 C31.1 C32.1 C33.1 C34.1 C35.1 C36.1 C37.1 C38.1 C39.1 C42.1 C43.1 D1.C D2.C PM1.7 PM1.26 PM2.7 PM2.26 PM3.7 PM3.26 PM4.7 PM4.26 PM5.7 PM5.26 PMC.17 R1.1 R2.1 RN1.5 RN1.6 RN2.5 RN2.6 U23.8
VUSB: C72.1 C73.1 FB2.1 U19.12
W_A_SCL: PM2.31 RN1.4 U1.6
W_A_SDA: PM2.30 RN1.3 U1.5
W_I2C_EN: PM2.17 U25.2
W_I2C_V: C53.1 PWR-SW.6 U25.6
W_VW: FBD.2 PM2.21 PWR-NW.4
W_VW_CV: PB-NW.20 PM2.18
W_VW_OV: PB-NW.9 PM2.10
W_VW_UV: PB-NW.11 PM2.33
ZED_5V: U16.6 U16.D1 U18.6 U22.2 ZED.57 ZED.58 ZED.59 ZED.60 ZED.112 ZED.157 ZED.158 ZED.159 ZED.160
ZED_!FAULT: IOC.41 U18.7
ZED_!INIT: BETA.109 ZED.109
ZED_!SHDN: IOC.36 U18.8
ZED_!SRST: IOC.24 ZED.6
ZED_DONE: BETA.8 IOC.25 ZED.8
ZED_GATE: R25.1 U16.2 U16.5 U18.5
ZED_IN: R9.2 R14.1 U13.1 U16.3 U16.D2 U17.A2 U18.4
ZED_OV: R15.2 R16.1 U18.2
ZED_PWR_EN: IOC.23 ZED.5
ZED_SUP: C79.1 R9.1 U17.A3 X1.2 X1.2A
ZED_TCK: IOC.13 ZED.1
ZED_TDI: IOC.15 ZED.4
ZED_TDO: IOC.12 ZED.3
ZED_TMS: IOC.14 ZED.2
ZED_UV: R14.2 R15.1 U18.3